# Altium PCB PCB1.PcbDoc (part 1 of 3)
Units mm, origin at the board's own origin, x right, y up, seen from the top; angles counter-clockwise.
Board outline 44.87 x 32.17 mm, 6 copper layers (Top Side, Inner Layer 1(GND), Inner Layer 2, Inner Layer 3, Inner Layer 4(GND), Bottom Side), stack 1.618 mm thick; 40 components, 39 nets, 233 pads, 118 vias.
Unrouted connection lines stored in the file: 1.
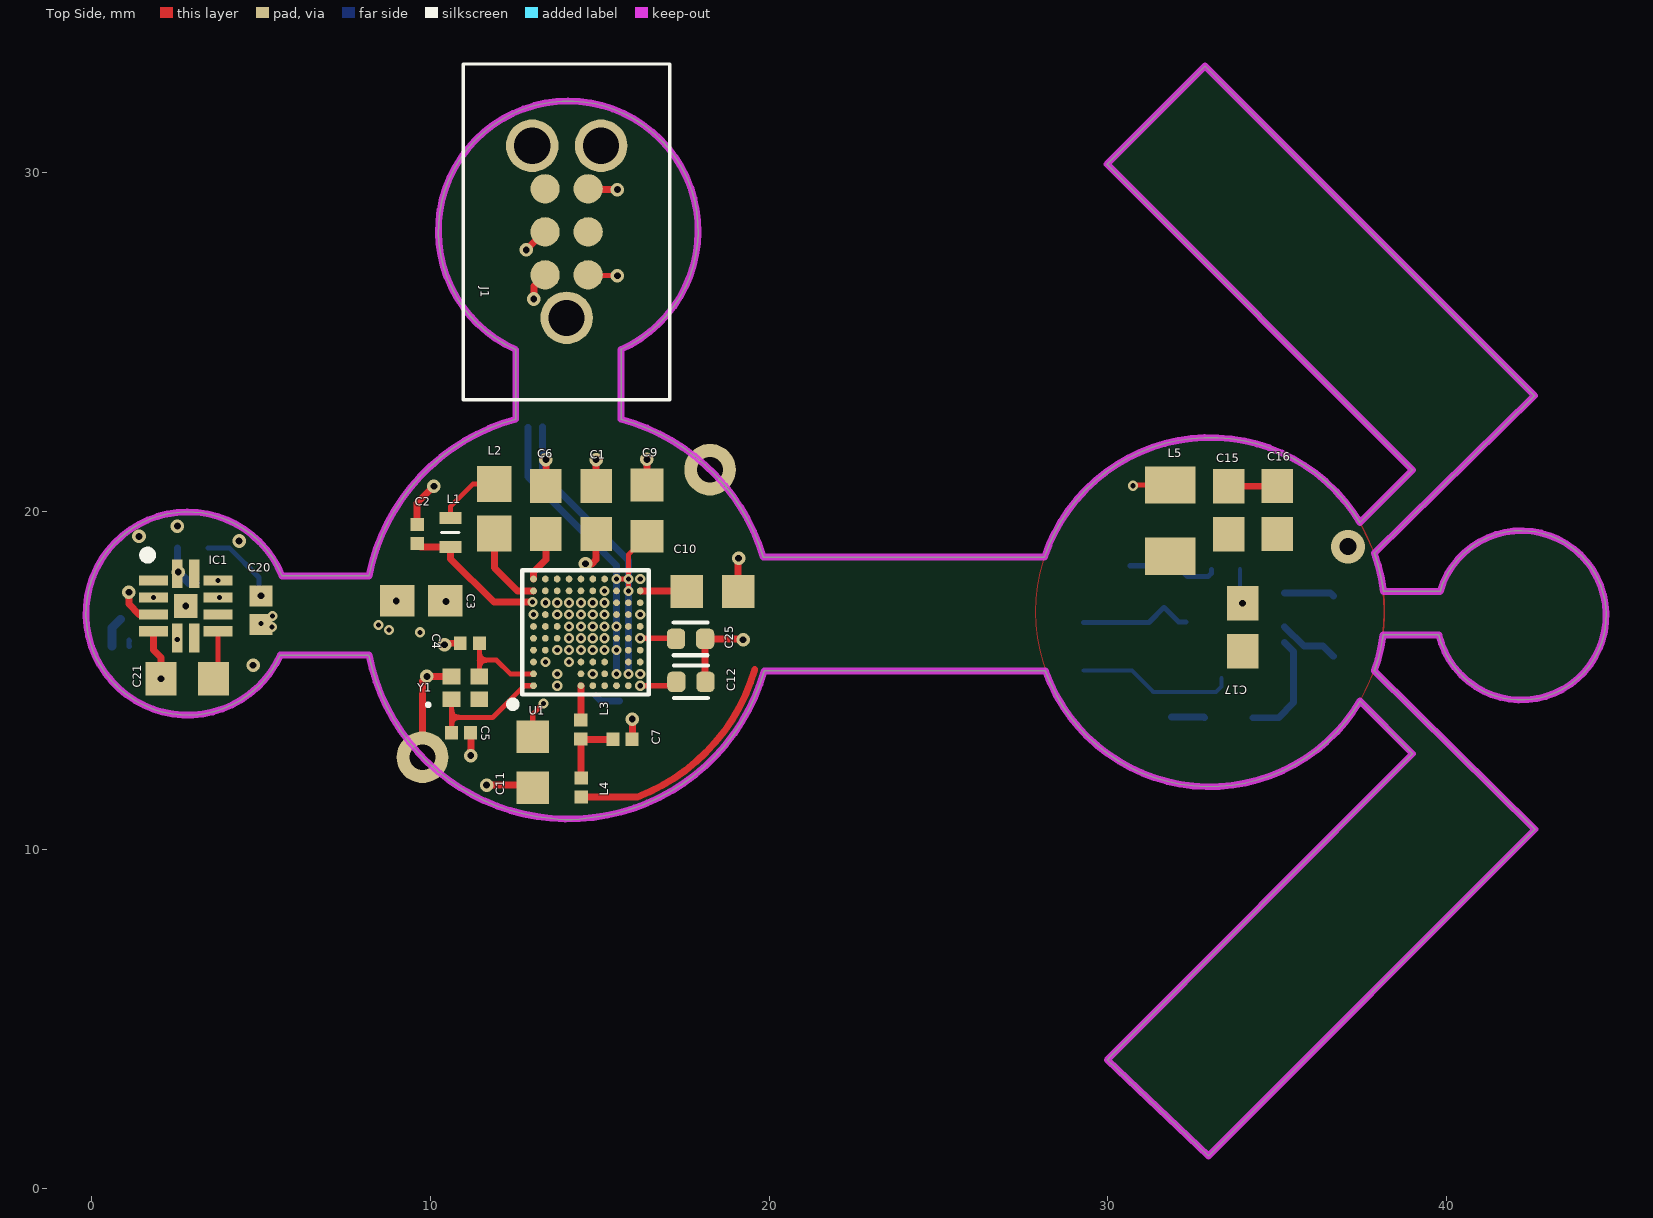
[diagram p0: Top Side view]
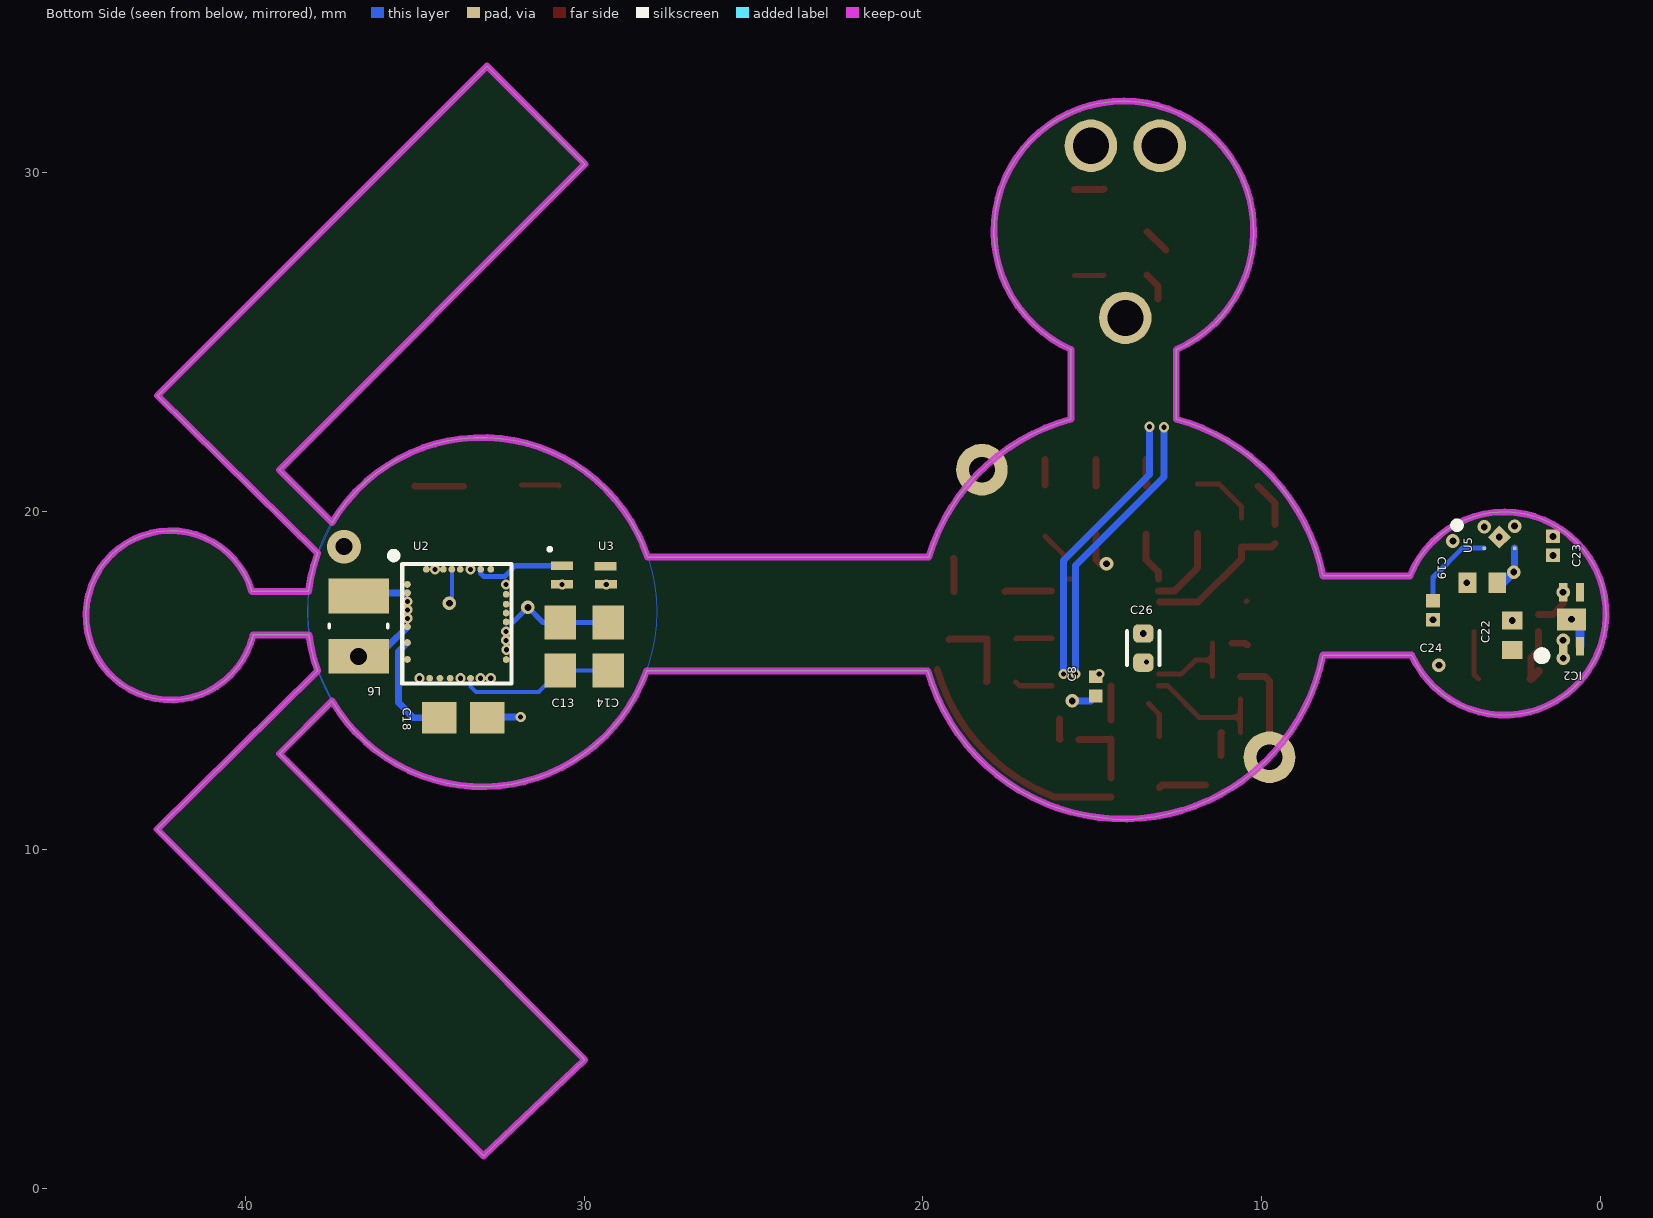
[diagram p1: Bottom Side view, seen from below]
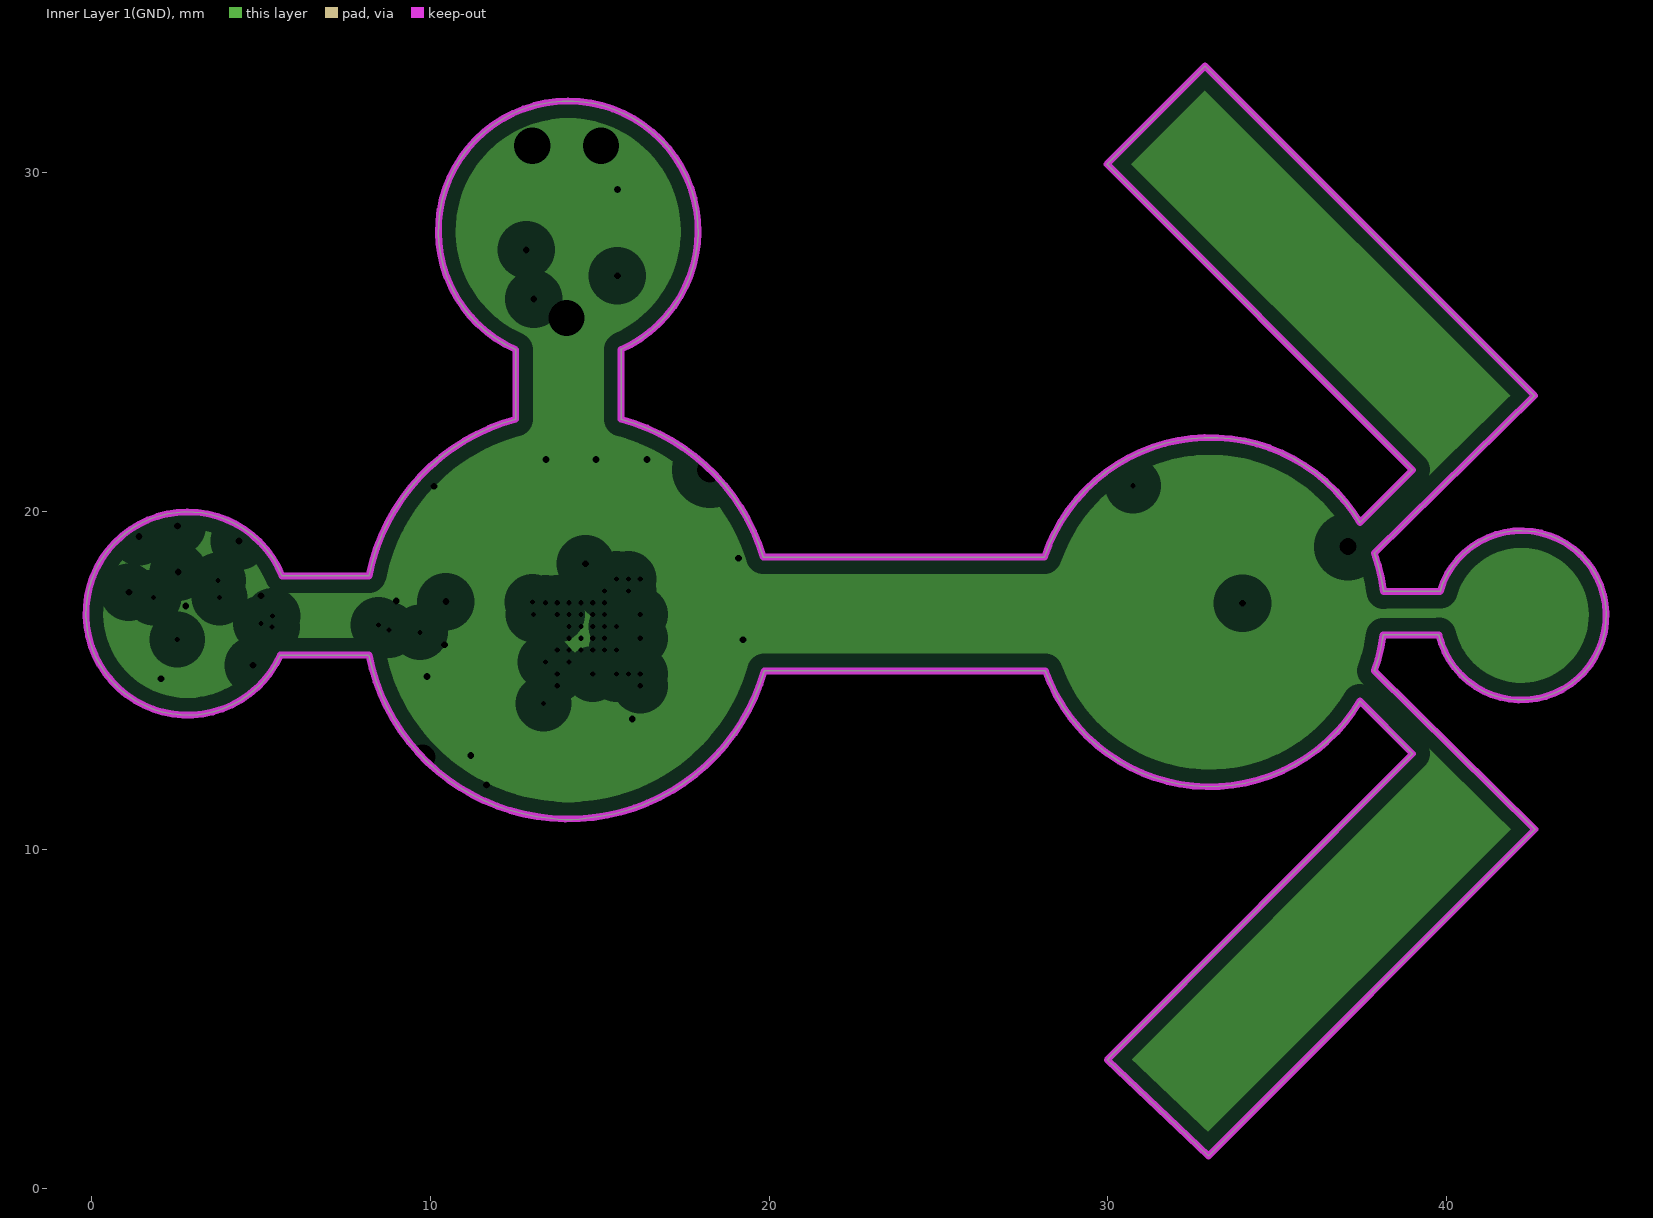
[diagram p2: Inner Layer 1(GND), clearances drawn from the general rule]
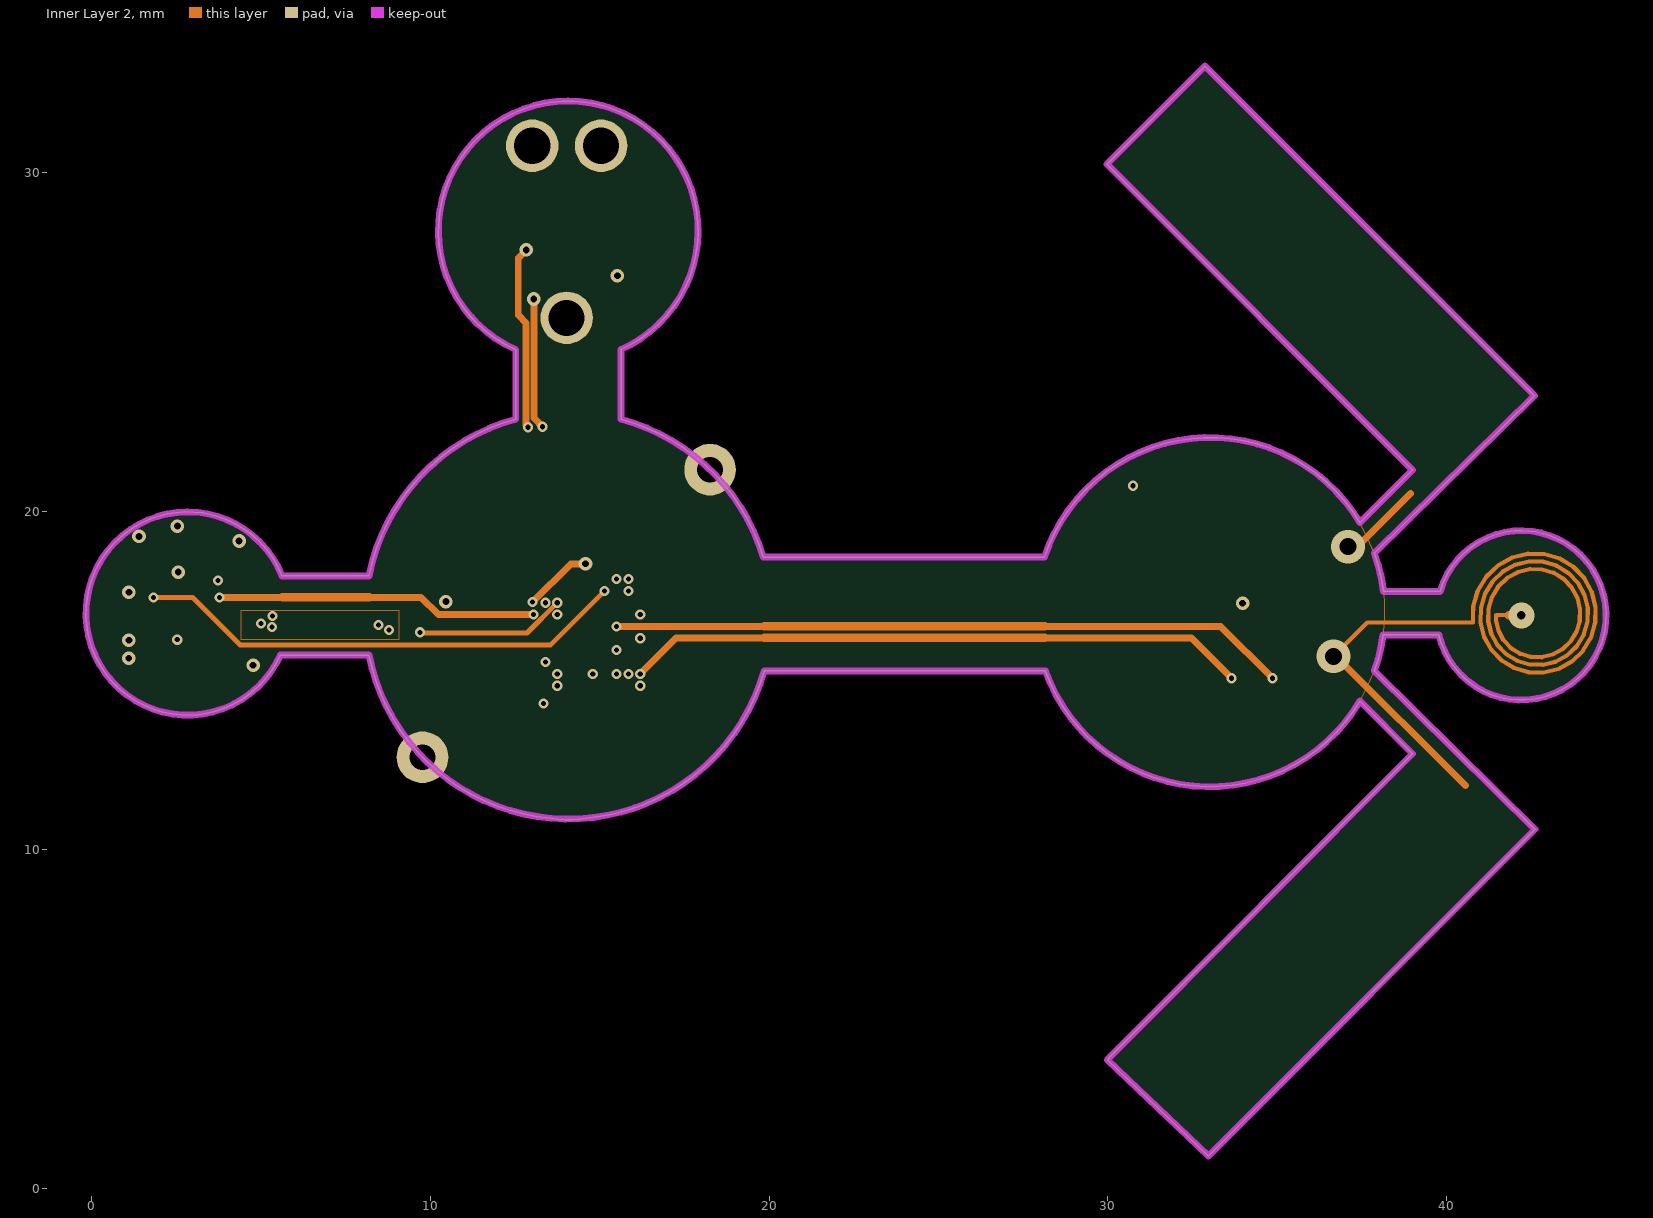
[diagram p3: Inner Layer 2]
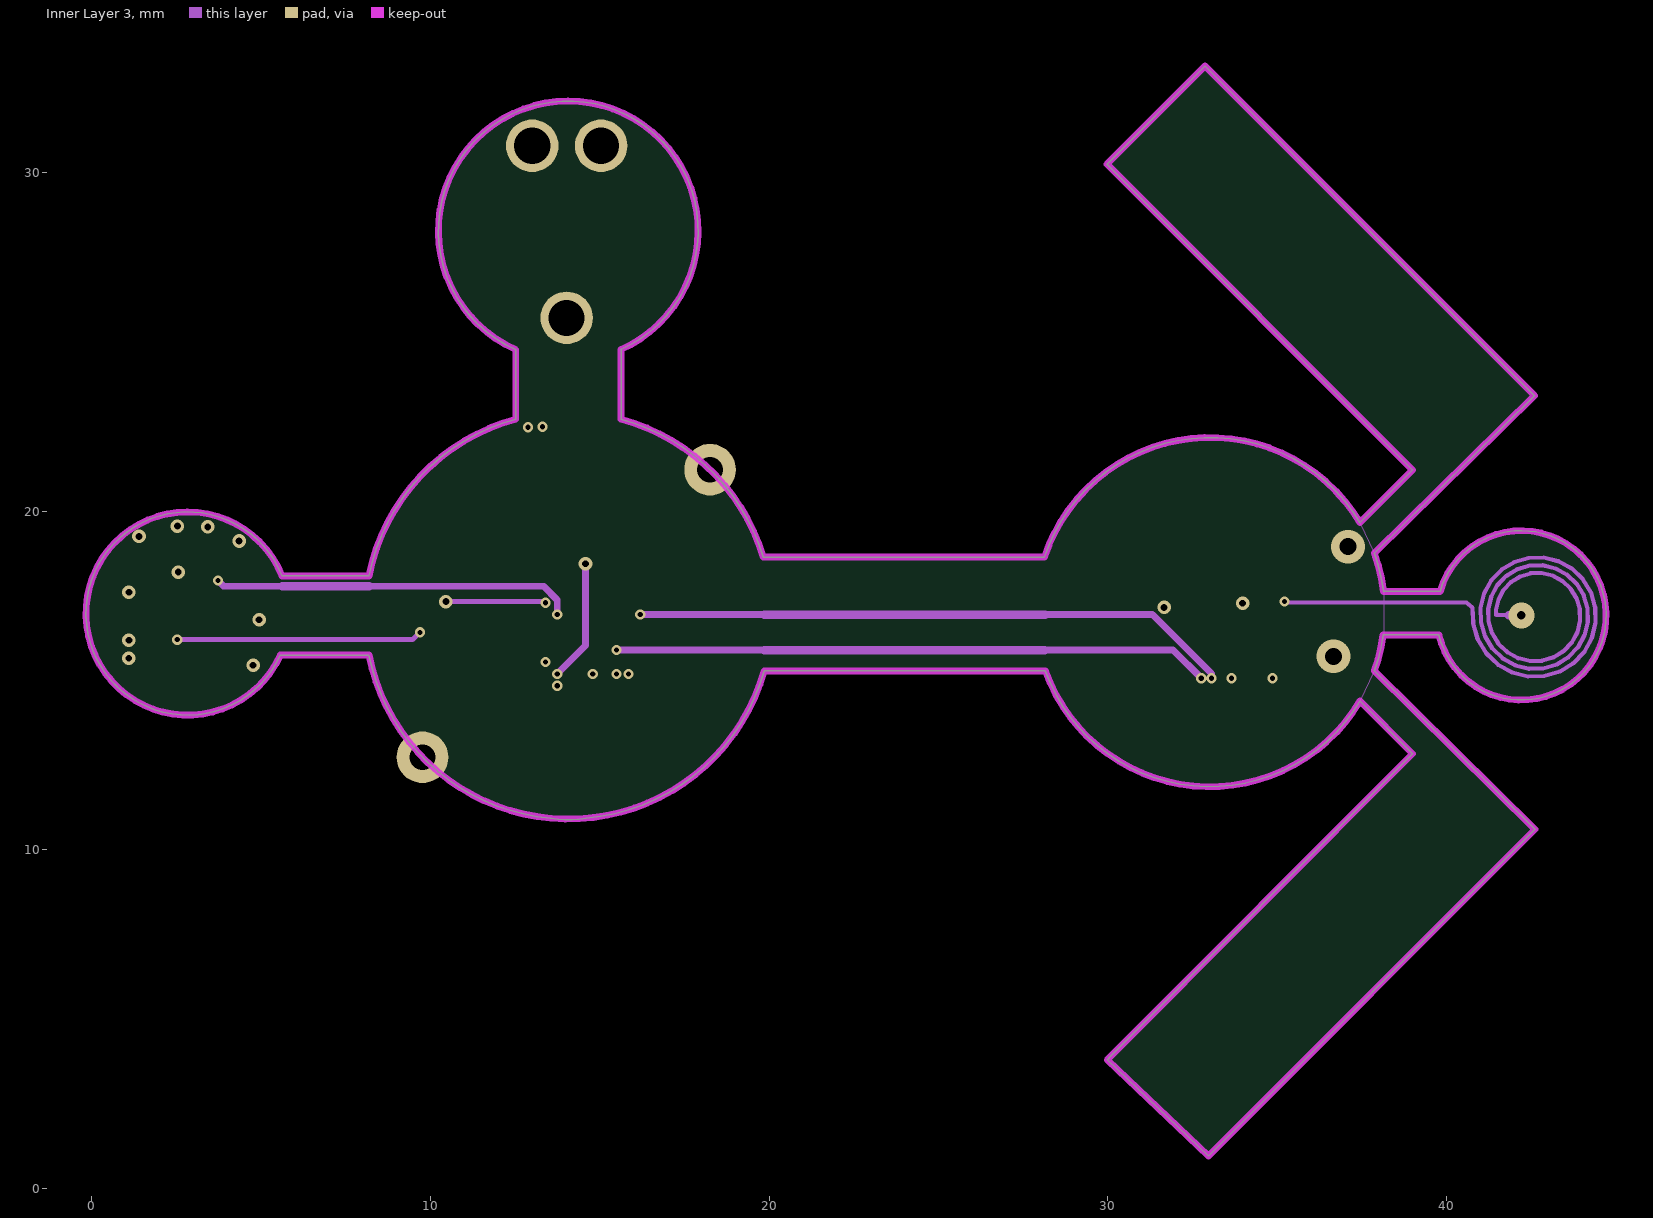
[diagram p4: Inner Layer 3]
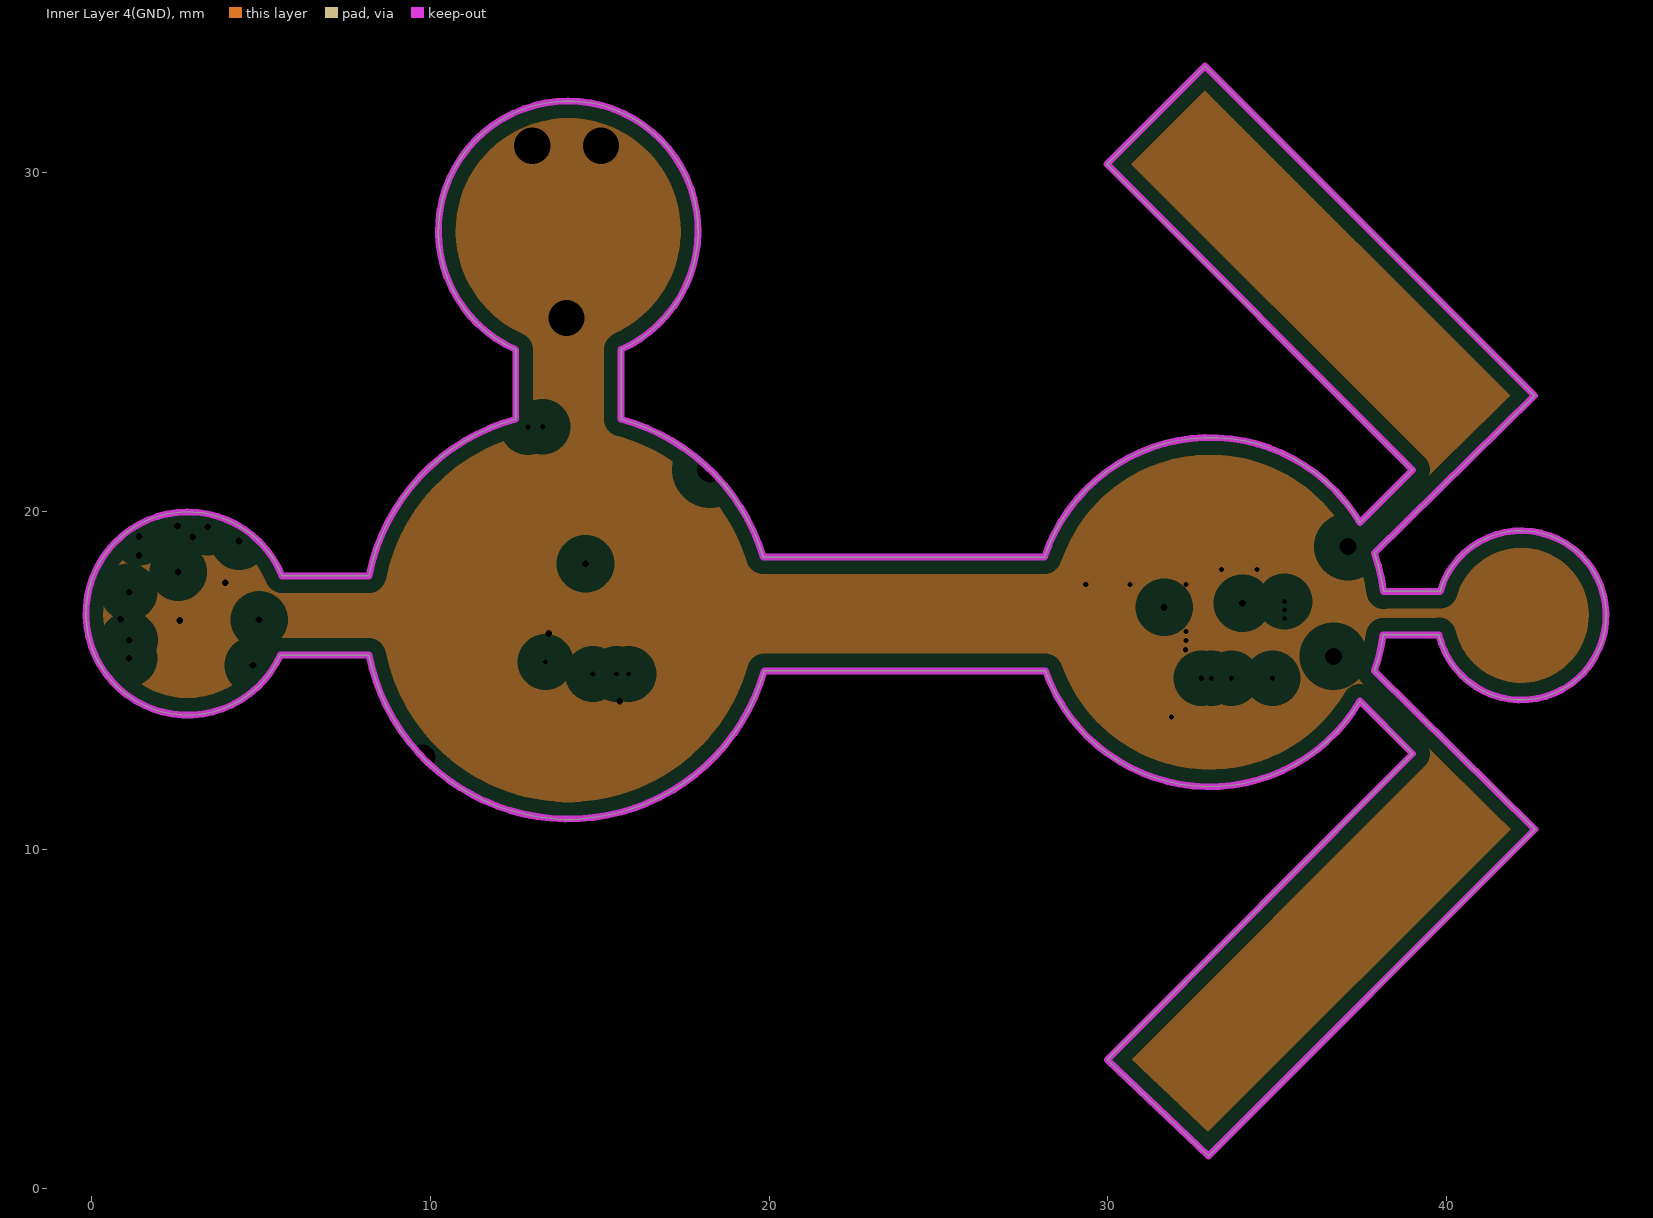
[diagram p5: Inner Layer 4(GND), clearances drawn from the general rule]
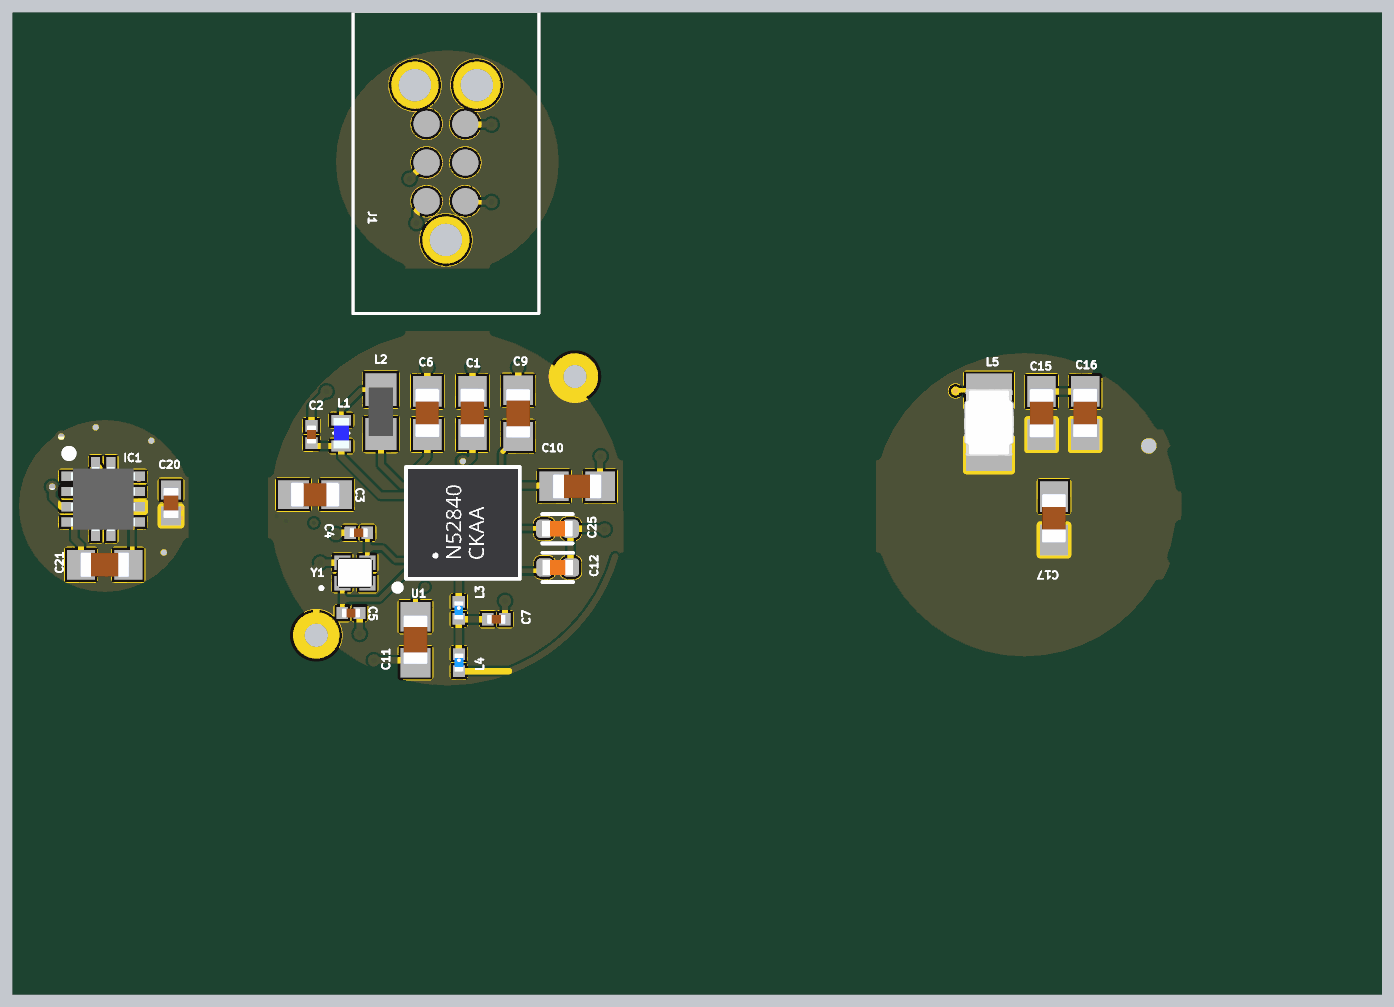
[diagram p7: 3D render of the assembled board from above, using the file's embedded part models]
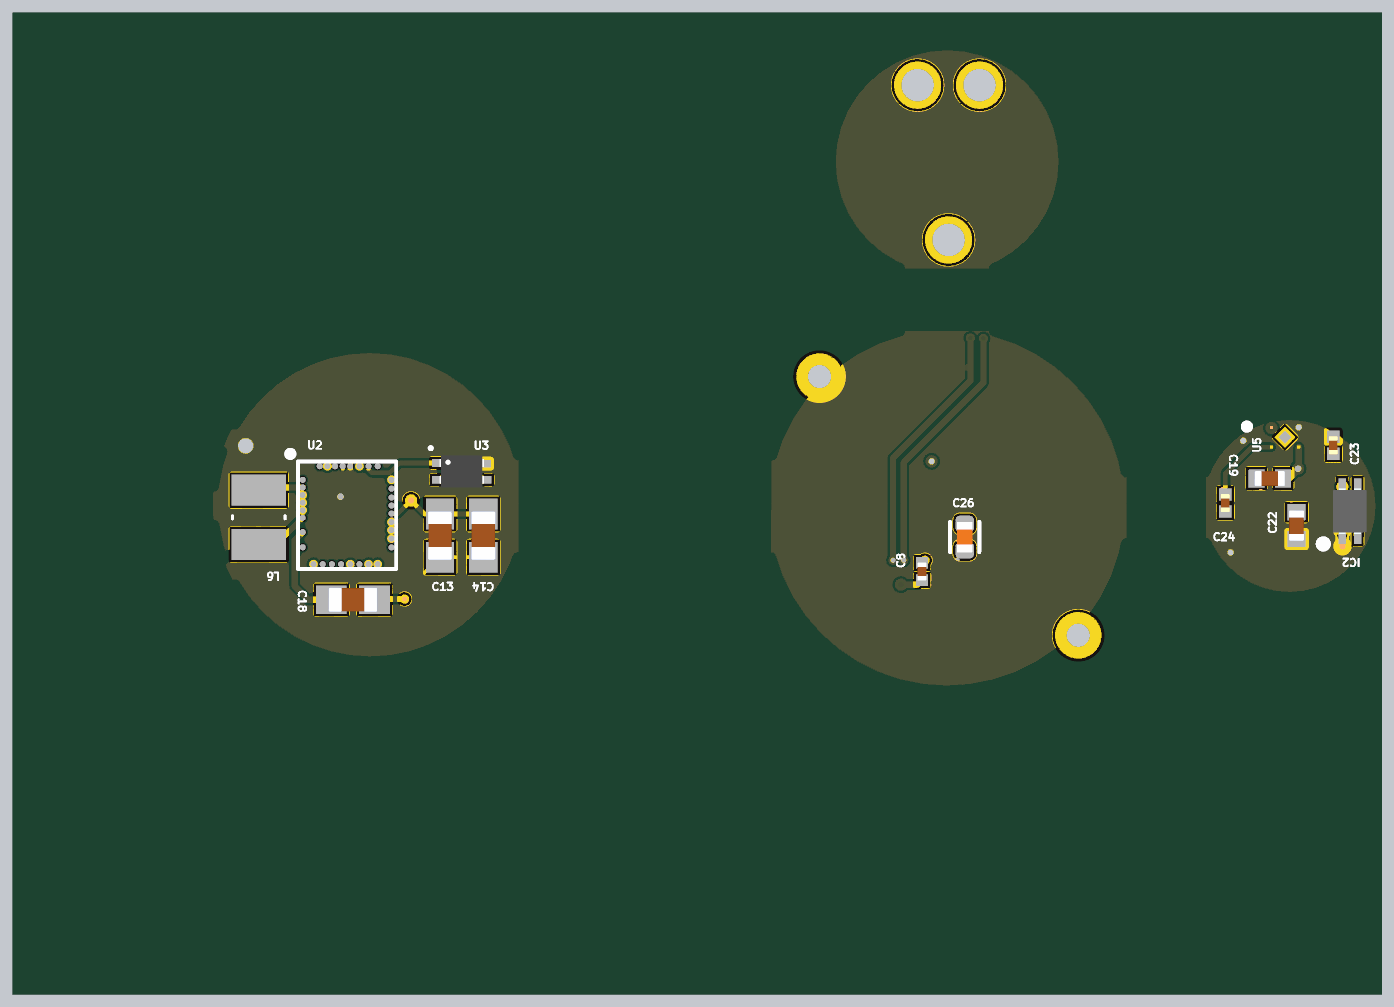
[diagram p8: 3D render of the assembled board from below, using the file's embedded part models]

## Layer stack, top to bottom
Flex Top Coverlay: solder mask 0.015, WE-SM-0001, Dk 3.5
Flex Top Coverlay: solder mask 0.03, WE-CL-0001, Dk 3.6
Top Side: signal copper 0.04
Polyamide: core 0.05, WE-PI-0103, Dk 3.4
Dielectric 1: prepreg 0.065, WE-PP-0034, Dk 3.5
Core 1: core 0.36, WE-CO-0047, Dk 4.7
Dielectric 2: prepreg 0.18, WE-PP-0036, Dk 3.9
Inner Layer 1(GND): plane copper 0.017, net GND
Polyimide 1: core 0.05, WE-PI-0103, Dk 3.4
Inner Layer 2: signal copper 0.017
Dielectric 3: prepreg 0.06, WE-PB-0001, Dk 3.2
Inner Layer 3: signal copper 0.017
Polyimide 2: core 0.05, WE-PI-0103, Dk 3.4
Inner Layer 4(GND): plane copper 0.017, net GND
Dielectric 4: prepreg 0.18, WE-PP-0036, Dk 3.9
Core 2: core 0.36, WE-CO-0047, Dk 4.7
Dielectric 5: prepreg 0.065, WE-PP-0034, Dk 3.5
Polyimide 4: core 0.05, WE-PI-0103, Dk 3.4
Bottom Side: signal copper 0.04
Bottom Solder: solder mask 0.03, WE-CL-0001, Dk 3.6
Bottom Solder: solder mask 0.015, WE-SM-0001, Dk 3.5

## Board outline
14.595,10.936 cw(c14.588,10.939) 14.591,10.933 cw(c14.599,10.926) 14.598,10.936 cw(c14.082,13.661) 13.548,10.94 cw(c13.535,10.902) 13.561,10.933 cw(c13.566,10.961) 13.551,10.936 cw(c13.549,10.937) 13.55,10.935 cw(c13.549,10.932) 13.551,10.933 cw(c14.075,16.914) 8.185,15.748 5.569,15.749 cw(c2.832,16.977) 5.619,18.085 8.186,18.085 cw(c14.074,16.914) 12.521,22.713 12.521,24.766 cw(c14.067,28.273) 15.625,24.771 15.628,24.771 15.628,22.713 cw(c14.075,16.914) 19.823,18.644 28.127,18.644 cw(c33.015,17.021) 37.438,19.66 38.994,21.216 29.969,30.241 32.864,33.136 42.593,23.407 37.866,18.762 cw(c33.081,17.026) 38.136,17.625 38.138,17.627 39.802,17.627 39.805,17.626 cw(c42.203,16.922) 39.772,16.344 39.77,16.343 38.12,16.343 cw(c33.072,16.991) 37.866,15.283 42.607,10.607 32.965,0.965 29.985,3.8 30.035,3.861 38.994,12.836 37.438,14.392 cw(c33.005,17.014) 28.155,15.283 19.852,15.283 cw(c14.075,16.913) 14.598,10.933 cw(c14.6,10.939)
board region "Layer Stack Region 1": 37.873,15.276 42.607,10.607 32.965,0.965 29.985,3.8 30.035,3.861 38.994,12.836 37.438,14.392
board region "Layer Stack Region 1": 37.438,19.66 38.994,21.216 29.969,30.241 32.864,33.136 42.593,23.407 37.866,18.762
board region "Layer Stack Region 1": 38.155,17.627 39.805,17.626 39.868,17.843 40.071,18.246 40.343,18.607 40.675,18.913 41.056,19.155 41.475,19.324 41.917,19.416 42.368,19.427 42.814,19.357 43.24,19.208 43.633,18.985 43.98,18.696 44.269,18.349 44.491,17.956 44.639,17.529 44.708,17.083 44.697,16.632 44.604,16.19 44.434,15.772 44.192,15.391 43.885,15.059 43.524,14.788 43.121,14.586 42.687,14.459 42.238,14.413 41.788,14.447 41.351,14.562 40.942,14.752 40.574,15.014 40.258,15.336 40.005,15.711 39.824,16.124 39.77,16.343 38.129,16.343
board region "Layer Stack Region 1": 19.823,18.644 28.127,18.644 28.154,15.283 19.852,15.283
board region "Layer Stack Region 1": 37.438,14.392 37.29,14.141 36.938,13.675 36.535,13.252 36.088,12.878 35.601,12.556 35.08,12.291 34.533,12.087 33.967,11.946 33.388,11.87 32.804,11.859 32.223,11.915 31.652,12.036 31.098,12.221 30.569,12.467 30.071,12.772 29.61,13.13 29.193,13.539 28.825,13.992 28.51,14.484 28.253,15.008 28.155,15.283 28.154,15.283 28.127,18.644 28.219,18.924 28.467,19.457 28.775,19.959 29.137,20.423 29.55,20.843 30.008,21.213 30.505,21.528 31.034,21.785 31.59,21.979 32.164,22.109 32.749,22.173 33.338,22.17 33.922,22.1 34.495,21.963 35.048,21.763 35.575,21.5 36.068,21.179 36.522,20.805 36.93,20.38 37.287,19.913 37.438,19.66 37.866,18.762 37.916,18.624 38,18.343 38.067,18.058 38.118,17.77 38.138,17.627 38.155,17.627 38.129,16.343 38.12,16.343 38.103,16.208 38.053,15.939 37.99,15.673 37.912,15.411 37.866,15.283 37.873,15.276
board region "Layer Stack Region 1": 15.628,24.771 15.628,22.713 12.521,22.713 12.521,24.766
board region "Layer Stack Region 1": 12.521,24.766 12.255,24.883 11.764,25.195 11.327,25.577 10.951,26.021 10.648,26.517 10.422,27.053 10.28,27.616 10.224,28.195 10.256,28.775 10.376,29.344 10.579,29.889 10.863,30.396 11.22,30.855 11.642,31.255 12.119,31.586 12.641,31.842 13.196,32.017 13.77,32.105 14.351,32.106 14.926,32.019 15.481,31.847 16.004,31.593 16.483,31.263 16.906,30.864 17.264,30.407 17.55,29.9 17.755,29.357 17.876,28.788 17.911,28.208 17.857,27.629 17.716,27.065 17.493,26.528 17.19,26.032 16.817,25.586 16.38,25.203 15.891,24.889 15.628,24.771
board region "Layer Stack Region 1": 19.852,15.283 19.77,14.992 19.548,14.429 19.271,13.891 18.94,13.384 18.561,12.913 18.136,12.482 17.67,12.096 17.167,11.759 16.633,11.474 16.074,11.245 15.494,11.073 14.899,10.959 14.598,10.936 14.468,10.912 14.205,10.887 13.94,10.888 13.677,10.914 13.551,10.933 13.23,10.961 12.597,11.086 11.981,11.278 11.389,11.535 10.829,11.853 10.305,12.23 9.825,12.661 9.394,13.141 9.016,13.664 8.697,14.225 8.44,14.816 8.248,15.432 8.185,15.748 8.186,18.085 8.241,18.359 8.4,18.892 8.607,19.409 8.862,19.905 9.161,20.375 9.502,20.815 9.883,21.221 10.3,21.591 10.749,21.92 11.227,22.206 11.729,22.447 12.252,22.641 12.521,22.713 15.628,22.713 15.997,22.614 16.704,22.324 17.369,21.947 17.98,21.489 18.529,20.958 19.005,20.36 19.402,19.708 19.713,19.01 19.823,18.644
board region "Layer Stack Region 1": 8.185,15.748 5.583,15.749 5.621,18.085 8.186,18.085
board region "Layer Stack Region 1": 5.583,15.749 5.569,15.749 5.463,15.514 5.175,15.087 4.819,14.715 4.404,14.409 3.943,14.179 3.449,14.03 2.938,13.968 2.423,13.994 1.921,14.107 1.445,14.305 1.009,14.58 0.627,14.926 0.31,15.332 0.066,15.786 -0.097,16.275 -0.173,16.785 -0.162,17.3 -0.063,17.806 0.12,18.287 0.383,18.73 0.718,19.122 1.115,19.451 1.562,19.707 2.046,19.884 2.553,19.975 3.068,19.979 3.577,19.895 4.063,19.725 4.514,19.475 4.915,19.151 5.255,18.764 5.524,18.325 5.62,18.085 5.621,18.085

## Design rules (kind name [scope] priority, off if disabled: settings)
Clearance [All] p1: gap=0.076 ignorepadtopadclearanceinfootprint=TRUE
ComponentClearance [All] p1: gap=0 collisioncheckmode=3 verticalgap=0 showdistances=FALSE donotcheckwithout3dbody=TRUE checkcomponentboundary=TRUE
DiffPairsRouting [All] p1: maxlimit=0.254 minlimit=0.254 mostfreqgap=0.254 substack1={52EEE6FB-54B4-4EB6-A2AD-3B474344E788} toplayer_{52eee6fb-54b4-4eb6-a2ad-3b474344e788}_minwidth=0.381 toplayer_{52eee6fb-54b4-4eb6-a2ad-3b474344e788}_maxwidth=0.381 toplayer_{52eee6fb-54b4-4eb6-a2ad-3b474344e788}_prefwidth=0.381 midlayer1_{52eee6fb-54b4-4eb6-a2ad-3b474344e788}_minwidth=0.381 midlayer1_{52eee6fb-54b4-4eb6-a2ad-3b474344e788}_maxwidth=0.381 midlayer1_{52eee6fb-54b4-4eb6-a2ad-3b474344e788}_prefwidth=0.381 midlayer3_{52eee6fb-54b4-4eb6-a2ad-3b474344e788}_minwidth=0.381 midlayer3_{52eee6fb-54b4-4eb6-a2ad-3b474344e788}_maxwidth=0.381 midlayer3_{52eee6fb-54b4-4eb6-a2ad-3b474344e788}_prefwidth=0.381 bottomlayer_{52eee6fb-54b4-4eb6-a2ad-3b474344e788}_minwidth=0.381 bottomlayer_{52eee6fb-54b4-4eb6-a2ad-3b474344e788}_maxwidth=0.381 bottomlayer_{52eee6fb-54b4-4eb6-a2ad-3b474344e788}_prefwidth=0.381 toplayer_minwidth=0.381 toplayer_maxwidth=0.381 toplayer_prefwidth=0.381 midlayer1_minwidth=0.381 midlayer1_maxwidth=0.381 midlayer1_prefwidth=0.381 midlayer3_minwidth=0.381 midlayer3_maxwidth=0.381 midlayer3_prefwidth=0.381 bottomlayer_minwidth=0.381 bottomlayer_maxwidth=0.381 bottomlayer_prefwidth=0.381 substack2={FC846959-10B6-4683-9593-CBB50DF69E61} toplayer_{fc846959-10b6-4683-9593-cbb50df69e61}_minwidth=0.381 toplayer_{fc846959-10b6-4683-9593-cbb50df69e61}_maxwidth=0.381 toplayer_{fc846959-10b6-4683-9593-cbb50df69e61}_prefwidth=0.381 midlayer1_{fc846959-10b6-4683-9593-cbb50df69e61}_minwidth=0.381 midlayer1_{fc846959-10b6-4683-9593-cbb50df69e61}_maxwidth=0.381 midlayer1_{fc846959-10b6-4683-9593-cbb50df69e61}_prefwidth=0.381 midlayer3_{fc846959-10b6-4683-9593-cbb50df69e61}_minwidth=0.381 midlayer3_{fc846959-10b6-4683-9593-cbb50df69e61}_maxwidth=0.381 midlayer3_{fc846959-10b6-4683-9593-cbb50df69e61}_prefwidth=0.381 bottomlayer_{fc846959-10b6-4683-9593-cbb50df69e61}_minwidth=0.381 bottomlayer_{fc846959-10b6-4683-9593-cbb50df69e61}_maxwidth=0.381 bottomlayer_{fc846959-10b6-4683-9593-cbb50df69e61}_prefwidth=0.381 maxuncoupledlength=12.7
PlaneClearance "PlaneClearance RF" [InNetClass('2.4GhZ RF')] p1: clearance=0.127
PlaneClearance [All] p2: clearance=0.75
PlaneConnect [All] p1: planeconnectstyle=Direct reliefexpansion=0.508 reliefentries=4 reliefconductorwidth=0.254 reliefairgap=0.254
PolygonConnect [All] p1: connectstyle=Direct reliefconductorwidth=0.254 reliefentries=4 polygonreliefangle="90 Angle" airgapwidth=0.254
RoutingVias [All] p1: holewidth=0.2 width=0.4 viastyle="Through Hole" minholewidth=0.1 minwidth=0.2 maxholewidth=0.5 maxwidth=1
SilkToSilkClearance [All] p1: silktosilkclearance=0.15
SolderMaskExpansion [All] p1: expansion=0.102 istentingtop=FALSE
Width [All] p1: maxlimit=0.203 minlimit=0.076 preferedwidth=0.152 substack1={52EEE6FB-54B4-4EB6-A2AD-3B474344E788} toplayer_{52eee6fb-54b4-4eb6-a2ad-3b474344e788}_minwidth=0.1 toplayer_{52eee6fb-54b4-4eb6-a2ad-3b474344e788}_maxwidth=0.5 toplayer_{52eee6fb-54b4-4eb6-a2ad-3b474344e788}_prefwidth=0.15 midlayer1_{52eee6fb-54b4-4eb6-a2ad-3b474344e788}_minwidth=0.1 midlayer1_{52eee6fb-54b4-4eb6-a2ad-3b474344e788}_maxwidth=0.5 midlayer1_{52eee6fb-54b4-4eb6-a2ad-3b474344e788}_prefwidth=0.15 midlayer3_{52eee6fb-54b4-4eb6-a2ad-3b474344e788}_minwidth=0.1 midlayer3_{52eee6fb-54b4-4eb6-a2ad-3b474344e788}_maxwidth=0.5 midlayer3_{52eee6fb-54b4-4eb6-a2ad-3b474344e788}_prefwidth=0.15 bottomlayer_{52eee6fb-54b4-4eb6-a2ad-3b474344e788}_minwidth=0.1 bottomlayer_{52eee6fb-54b4-4eb6-a2ad-3b474344e788}_maxwidth=0.5 bottomlayer_{52eee6fb-54b4-4eb6-a2ad-3b474344e788}_prefwidth=0.15 substack2={FC846959-10B6-4683-9593-CBB50DF69E61} toplayer_{fc846959-10b6-4683-9593-cbb50df69e61}_minwidth=0.1 toplayer_{fc846959-10b6-4683-9593-cbb50df69e61}_maxwidth=0.5 toplayer_{fc846959-10b6-4683-9593-cbb50df69e61}_prefwidth=0.15 midlayer1_{fc846959-10b6-4683-9593-cbb50df69e61}_minwidth=0.1 midlayer1_{fc846959-10b6-4683-9593-cbb50df69e61}_maxwidth=0.5 midlayer1_{fc846959-10b6-4683-9593-cbb50df69e61}_prefwidth=0.15 midlayer3_{fc846959-10b6-4683-9593-cbb50df69e61}_minwidth=0.1 midlayer3_{fc846959-10b6-4683-9593-cbb50df69e61}_maxwidth=0.5 midlayer3_{fc846959-10b6-4683-9593-cbb50df69e61}_prefwidth=0.15 bottomlayer_{fc846959-10b6-4683-9593-cbb50df69e61}_minwidth=0.1 bottomlayer_{fc846959-10b6-4683-9593-cbb50df69e61}_maxwidth=0.5 bottomlayer_{fc846959-10b6-4683-9593-cbb50df69e61}_prefwidth=0.15
25 further rules are at their usual default settings.

## Classes and differential pairs
component class SS8400C: b C13 C14 C15 C16 C17 C18 L5 L6 U2 U3
component class BMS: C19 C20 C21 C22 C23 C24 IC1 IC2 U5
net class "2.4GhZ RF": Antenna NetC7_2 NetL3_1 NetL4_2
component class "nRF 52840": C1 C2 C3 C4 C5 C6 C7 C8 C9 C10 C11 C12 C25 C26 J1 L1 L2 L3 L4 U1 Y1

## Components (designator, comment, footprint, x,y, rotation, side; value= is the part's Value field where it differs from the comment)
C1 "1uF" CAPC1608X90N#1 14.891,20.03 r270 top
C2 "47nF" CAPC0603X33N#1 9.607,19.321 r270 top
C3 "1uF" CAPC1608X90N#1 9.728,17.348 r180 top
C4 "10pF" CAPC0603X33N#1 11.162,16.099 r180 top
C5 "10pF" CAPC0603X33N#1 10.904,13.462 r180 top
C6 "100nF" CAPC1608X90N#1 13.41,20.03 r90 top
C7 "1pF" CAPC0603X33N#1 15.672,13.259 r180 top
C8 "820pF" CAPC0603X33N#1 14.891,14.827 r90 bottom
C9 "4.7uF" CAPC1608X95N 16.391,20.015 r270 top
C10 "4.7uF" CAPC1608X95N 18.325,17.621 r180 top
C11 "4.7uF" CAPC1608X95N 13.021,12.588 r90 top
C12 "100nF" CAPC1005X55N#1 17.69,14.961 r0 top
C13 "100nF" CAPC1608X90N#1 30.707,16.004 r270 bottom
C14 "10nF" CAPC1608X90N#1 29.284,16.004 r90 bottom
C15 "10nF" CAPC1608X90N#1 33.564,20.023 r270 top
C16 "100nF" CAPC1608X90N#1 34.996,20.029 r90 top
C17 "100nF" CAPC1608X90N#1 33.973,16.572 r270 top
C18 "2.2nF" CAPC1608X90N#1 33.564,13.899 r180 bottom
C19 "2.2uF" CAPC1005X55N#2 3.48,17.882 r0 bottom
C20 "1uF" CAPC1005X56N 5,17.075 r270 top
C21 "68nF" CAPC1608X90N#2 2.825,15.048 r0 top
C22 "100nF" CAPC1005X55N#2 2.601,16.331 r90 bottom
C23 "470nF" CAPC0603X33N#2 1.397,18.971 r90 bottom
C24 "470nF" CAPC0603X33N#2 4.941,17.075 r270 bottom
C25 "100nF" CAPC1005X55N#1 17.679,16.229 r0 top
C26 "100nF" CAPC1005X55N#1 13.491,15.957 r270 bottom
IC1 "LTC4126EV#TRMPBF" QFN50P200X200X83-13N-D 2.776,17.201 r0 top
IC2 "DRV5032FDDMRR" SON50P140X110X40-5N 0.85,16.806 r90 bottom
J1 "TC2030-IDC-NL" TC2030IDCNL 14.021,28.245 r90 top
L1 "15nH" LQG15WH0N7B02D 10.588,19.368 r90 top
L2 "10uH" INDC1608X100N 11.887,20.066 r270 top
L3 "3.9nH" INDC0603X33N 14.443,13.553 r270 top
L4 "4.7nH" INDC0603X33N 14.446,11.836 r270 top
L5 "4.7uH" B82498F 31.841,19.717 r270 top
L6 "47uH" AISC0805F470GT 36.655,16.604 r0 bottom
U1 "nRF52840_CKAA" BGA94C35P10X10_352X356X50 14.618,16.42 r90 top
U2 "SS8400C" SS8400C_WLCSP 33.757,16.673 r180 bottom
U3 "STLM20DD9F" QFN55P130X100X55-4N 29.995,18.112 r180 bottom
U5 "AP7340-33FS4-7" VREG_AP7340-33FS4-7 2.98,19.232 r180 bottom
Y1 "32Mhz" XTAL_ECS-374-8-48-CKY-TR 11.033,14.78 r0 top

## Footprints (in the part's own frame and the unit in brackets; to place one, negate y for a bottom-side part, rotate by r counter-clockwise, add the part's x,y. Pads: shape width x height; smd on the part's side, far side on the other; paste and mask are expansions set on the pad)
AISC0805F470GT [mm]
  rect 1.78x1.02 smd: 1(0,-0.89) 2(0,0.89)
  silkscreen extent -0.86,-0.05 0.86,0.05
B82498F [mm]
  rect 1.1x1.5 smd: 1(-1.05,0) 2(1.05,0)
  body extent -1.1,-0.81 1.1,0.81, height 1.28
BGA94C35P10X10_352X356X50 [mm]
  round 0.2 smd mask+0.04: A1(-1.575,1.575) A2(-1.225,1.575) A3(-0.875,1.575) A4(-0.525,1.575) A5(-0.175,1.575) A6(0.175,1.575) A7(0.525,1.575) A8(0.875,1.575) A9(1.225,1.575) A10(1.575,1.575) B3(-0.875,1.225) B4(-0.525,1.225) B5(-0.175,1.225) B6(0.175,1.225) B7(0.525,1.225) B8(0.875,1.225) B9(1.225,1.225) B10(1.575,1.225) C1(-1.575,0.875) C2(-1.225,0.875) C4(-0.525,0.875) C5(-0.175,0.875) C6(0.175,0.875) C7(0.525,0.875) C8(0.875,0.875) C9(1.225,0.875) C10(1.575,0.875) D3(-0.875,0.525) D4(-0.525,0.525) D5(-0.175,0.525) D6(0.175,0.525) D7(0.525,0.525) D8(0.875,0.525) D9(1.225,0.525) D10(1.575,0.525) E1(-1.575,0.175) E2(-1.225,0.175) E3(-0.875,0.175) E4(-0.525,0.175) E5(-0.175,0.175) E6(0.175,0.175) E7(0.525,0.175) E8(0.875,0.175) E9(1.225,0.175) E10(1.575,0.175) F1(-1.575,-0.175) F2(-1.225,-0.175) F3(-0.875,-0.175) F4(-0.525,-0.175) F5(-0.175,-0.175) F6(0.175,-0.175) F7(0.525,-0.175) F8(0.875,-0.175) F9(1.225,-0.175) F10(1.575,-0.175) G1(-1.575,-0.525) G2(-1.225,-0.525) G3(-0.875,-0.525) G4(-0.525,-0.525) G5(-0.175,-0.525) G6(0.175,-0.525) G7(0.525,-0.525) G8(0.875,-0.525) G9(1.225,-0.525) G10(1.575,-0.525) H1(-1.575,-0.875) H2(-1.225,-0.875) H4(-0.525,-0.875) H5(-0.175,-0.875) H6(0.175,-0.875) H7(0.525,-0.875) H8(0.875,-0.875) H9(1.225,-0.875) H10(1.575,-0.875) J1(-1.575,-1.225) J2(-1.225,-1.225) J3(-0.875,-1.225) J4(-0.525,-1.225) J5(-0.175,-1.225) J6(0.175,-1.225) J7(0.525,-1.225) J8(0.875,-1.225) J9(1.225,-1.225) J10(1.575,-1.225) K1(-1.575,-1.575) K2(-1.225,-1.575) K3(-0.875,-1.575) K4(-0.525,-1.575) K5(-0.175,-1.575) K6(0.175,-1.575) K7(0.525,-1.575) K8(0.875,-1.575) K9(1.225,-1.575) K10(1.575,-1.575)
  silkscreen extent -2.22,-1.83 1.83,2.28, body extent -1.77,-1.76 1.77,1.84, height 0.47
CAPC0603X33N#1 [mm]
  rect 0.38x0.4 smd: 1(-0.281,0) 2(0.281,0)
  body extent -0.3,-0.15 0.3,0.15, height 0.3
CAPC0603X33N#2 [mm]
  rect 0.4x0.42 smd: 1(-0.28,0) 2(0.28,0)
  body extent -0.3,-0.15 0.3,0.15, height 0.33
CAPC1005X55N#1 [mm]
  rrect53% 0.54x0.6 smd: 1(-0.43,0) 2(0.43,0)
  silkscreen extent -0.5,-0.48 0.5,0.48, body extent -0.5,-0.25 0.5,0.25, height 0.55
CAPC1005X55N#2 [mm]
  rect 0.53x0.6 smd: 1(-0.437,0) 2(0.437,0)
  body extent -0.5,-0.25 0.5,0.25, height 0.55
CAPC1005X56N [mm]
  rect 0.62x0.67 smd: 1(-0.425,0) 2(0.425,0)
  body extent -0.5,-0.25 0.5,0.25, height 0.56
CAPC1608X90N#1 [mm]
  rect 1.01x0.93 smd: 1(-0.709,0) 2(0.709,0)
  body extent -0.8,-0.4 0.8,0.4, height 0.9
CAPC1608X90N#2 [mm]
  rect 0.92x0.98 smd: 1(-0.775,0) 2(0.775,0)
  body extent -0.8,-0.41 0.8,0.41, height 0.9
CAPC1608X95N [mm]
  rect 0.96x0.97 smd: 1(-0.755,0) 2(0.755,0)
  body extent -0.8,-0.4 0.8,0.4, height 0.95
INDC0603X33N [mm]
  rect 0.38x0.4 smd: 1(-0.281,0) 2(0.281,0)
  body extent -0.3,-0.15 0.3,0.15, height 0.33
INDC1608X100N [mm]
  rect 1.06x1.02 smd: 1(-0.728,0) 2(0.728,0)
  body extent -0.8,-0.4 0.8,0.4, height 1
LQG15WH0N7B02D [mm]
  rect 0.35x0.65 smd: 1(-0.425,0) 2(0.425,0)
  silkscreen extent 0,-0.25 0,0.25, body extent -0.5,-0.25 0.5,0.25, height 0.55
QFN50P200X200X83-13N-D [mm]
  rect 0.85x0.3 smd: 1(-0.95,0.75) 2(-0.95,0.25) 3(-0.95,-0.25) 4(-0.95,-0.75) 7(0.95,-0.75) 8(0.95,-0.25) 9(0.95,0.25) 10(0.95,0.75)
  rect 0.3x0.85 smd: 5(-0.25,-0.95) 6(0.25,-0.95) 11(0.25,0.95) 12(-0.25,0.95)
  rect 0.7x0.7 smd: 13(0,0)
  silkscreen extent -1.25,1.38 -1,1.62, body extent -1.05,-1.05 1.05,1.05, height 0.83
QFN55P130X100X55-4N [mm] "QFN, 4-Leads, Body 1.30x1.00mm, Pitch 0.55mm, IPC Medium Density"
  rect 0.65x0.25 smd: 1(-0.65,0.275) 2(-0.65,-0.275) 3(0.65,-0.275) 4(0.635,0.254)
  silkscreen extent -1.07,0.71 -0.97,0.81, body extent -0.72,-0.53 0.72,0.53, height 0.55
SON50P140X110X40-5N [mm]
  rect 0.55x0.25 smd: 1(-0.8,0.25) 2(-0.8,-0.25) 3(0.8,-0.25) 4(0.8,0.25)
  rect 0.65x0.85 smd: 5(0,0)
  silkscreen extent -1.2,0.75 -0.95,1, body extent -0.75,-0.55 0.75,0.55, height 0.4
SS8400C_WLCSP [mm]
  round 0.2 smd mask+0.04: 1(1.458,1.162) 2(1.458,0.871) 3(1.458,0.58) 4(1.458,0.054) 5(1.458,-0.226) 6(1.458,-0.488) 7(1.458,-0.766) 8(1.458,-1.057) 9(1.003,-1.607) 10(0.703,-1.607) 11(0.406,-1.607) 12(0.106,-1.607) 13(-0.197,-1.607) 14(-0.497,-1.607) 15(-0.799,-1.607) 16(-1.101,-1.607) 17(-1.457,-1.053) 18(-1.457,-0.555) 19(-1.457,-0.088) 20(-1.457,0.162) 21(-1.457,0.412) 22(-1.457,0.662) 23(-1.457,0.912) 24(-1.457,1.162) 25(-0.897,1.608) 26(-0.646,1.608) 27(-0.397,1.608) 28(-0.144,1.608) 29(0.103,1.608) 30(0.406,1.608) 31(0.706,1.608) 32(1.006,1.608) 33(1.458,0.318)
  silkscreen extent -1.96,-1.76 1.61,2.11, body extent -1.55,-1.7 1.55,1.7, height 0.25
TC2030IDCNL [mm]
  round 0.863 smd: 1(-1.27,-0.635) 2(-1.27,0.635) 3(0,-0.635) 4(0,0.635) 5(1.27,-0.635) 6(1.27,0.635)
  round 1.55 hole 1.067: 7(-2.54,0) 8(2.54,-1.016) 9(2.54,1.016)
  silkscreen extent -4.95,-3.05 4.95,3.05
VREG_AP7340-33FS4-7 [mm]
  rect 0.1x0.1 smd paste-1 mask+0: 1(-0.45,0.325) 2(-0.45,-0.325) 3(0.45,-0.325) 4(0.45,0.325)
  rect 0.48x0.48 smd rot 45 paste-0.088: 5(0,0)
  silkscreen extent -1.35,0.25 -1.15,0.45
XTAL_ECS-374-8-48-CKY-TR [mm]
  rect 0.52x0.47 smd: 1(-0.41,-0.335) 2(0.41,-0.335) 3(0.41,0.335) 4(-0.41,0.335)
  silkscreen extent -1.15,-0.55 -1.05,-0.45, body extent -0.6,-0.5 0.6,0.5, height 0.33

## Part data
C1 C3: library part C1608X7R1C105K080AC, "TDK - C1608X7R1C105K080AC - SMD Multilayer Ceramic Capacitor, 1 µF, 16 V, 0603 [1608 Metric], ± 10%, X7R, C Series TDK", Case Code (Imperial)=0603, Case Code (Metric)=1608, Dielectric=X7R, Dielectric Material=Ceramic, Manufacturer=TDK, Max Operating Temperature=125°C, Min Operating Temperature=-55°C, Package Quantity=1, Tolerance=10%, Voltage=16V, Capacitance=1uF, Case/Package=0603, Category="Ceramic Capacitors", ComponentLink1Description=https://datasheet.ciiva.com/11788/0900766b80c1bb00-11788075.pdf?src-supplier=RSComponents, ComponentLink1URL=https://datasheet.ciiva.com/11788/0900766b80c1bb00-11788075.pdf?src-supplier=RSComponents, ComponentLink2Description=https://datasheet.ciiva.com/22648/1796654-22648704.pdf?src-supplier=Element14, ComponentLink2URL=https://datasheet.ciiva.com/22648/1796654-22648704.pdf?src-supplier=Element14, ComponentLink3Description=https://datasheet.ciiva.com/26285/3025c1608x7r1c105k080ac-26285242.pdf?src-supplier=Onlinecomponents.com, ComponentLink3URL=https://datasheet.ciiva.com/26285/3025c1608x7r1c105k080ac-26285242.pdf?src-supplier=Onlinecomponents.com, ComponentLink4Description=https://datasheet.ciiva.com/15192/getdatasheetpartid-715881-15192029.pdf?src-supplier=Verical, ComponentLink4URL=https://datasheet.ciiva.com/15192/getdatasheetpartid-715881-15192029.pdf?src-supplier=Verical, ComponentLink5Description=https://datasheet.ciiva.com/17487/e412-c-17487343.pdf?src-supplier=Avnet+Europe, ComponentLink5URL=https://datasheet.ciiva.com/17487/e412-c-17487343.pdf?src-supplier=Avnet+Europe, ComponentLink6Description=https://datasheet.ciiva.com/22694/1796654-22694127.pdf?src-supplier=Element14, ComponentLink6URL=https://datasheet.ciiva.com/22694/1796654-22694127.pdf?src-supplier=Element14, ComponentLink7Description=https://datasheet.ciiva.com/6250/tdkmlcccaprange-6250871.pdf?src-supplier=Digi-Key, ComponentLink7URL=https://datasheet.ciiva.com/6250/tdkmlcccaprange-6250871.pdf?src-supplier=Digi-Key, ComponentLink8Description=https://datasheet.ciiva.com/16199/e412-c-16199815.pdf?src-supplier=Future+Electronics, ComponentLink8URL=https://datasheet.ciiva.com/16199/e412-c-16199815.pdf?src-supplier=Future+Electronics, ComponentLink9Description=https://datasheet.ciiva.com/6156/1571323-6156168.pdf?src-supplier=Farnell, ComponentLink9URL=https://datasheet.ciiva.com/6156/1571323-6156168.pdf?src-supplier=Farnell, ComponentLink10Description=https://datasheet.ciiva.com/48671/e412-c-48671305.pdf?src-supplier=Avnet, ComponentLink10URL=https://datasheet.ciiva.com/48671/e412-c-48671305.pdf?src-supplier=Avnet, ComponentLink11Description=https://datasheet.ciiva.com/22749/1744655-22749595.pdf?src-supplier=Element14, ComponentLink11URL=https://datasheet.ciiva.com/22749/1744655-22749595.pdf?src-supplier=Element14, Construction=Flat, Depth=0.8mm, Height=0.8mm, Lead Free="Lead Free", Length=1.6mm, Manufacturer Part Number=C1608X7R1C105K080AC, Mount="Surface Mount", Packaging="Tape and Reel", Pricing 1="1=0.13000, 10=0.09600, 50=0.05440, 100=0.04500, 500=0.03156, 1000=0.02613 (USD)", Radiation Hardening=No, REACH SVHC="No SVHC", Resistor Type=Ceramic, RoHS=Yes, RoHS Compliant=Yes, Series=C, Stock 1=2663219, Supplier 1=Digi-Key, Termination=SMD/SMT, Thickness=0.037inch, Voltage Rating=16V, Voltage Rating (DC)=16V, Weight=7.1E-05oz, Width=0.031inch
C2: library part GRM033R61C473KE84D, "0201 47 nF 16 V ±10% Tolerance X5R SMT Multilayer Ceramic Capacitor", Case Code (Imperial)=0201, Case Code (Metric)=0603, Dielectric=X5R, Manufacturer=Murata, Max Operating Temperature=85°C, Min Operating Temperature=-55°C, Package Quantity=15000, Tolerance=10%, Voltage Rating=16V, Capacitance=47nF, Case/Package=0201, Category="Ceramic Capacitors", ComponentLink1Description=https://datasheet.ciiva.com/18699/grm033r61c473ke84-01-18699268.pdf?src-supplier=Digi-Key, ComponentLink1URL=https://datasheet.ciiva.com/18699/grm033r61c473ke84-01-18699268.pdf?src-supplier=Digi-Key, ComponentLink2Description=https://datasheet.ciiva.com/18699/partnumbering-e-01-18699269.pdf?src-supplier=Digi-Key, ComponentLink2URL=https://datasheet.ciiva.com/18699/partnumbering-e-01-18699269.pdf?src-supplier=Digi-Key, ComponentLink3Description=https://datasheet.ciiva.com/24221/c02e-24221301.pdf?src-supplier=Mouser, ComponentLink3URL=https://datasheet.ciiva.com/24221/c02e-24221301.pdf?src-supplier=Mouser, ComponentLink4Description=https://datasheet.ciiva.com/18699/partnumbering-e-01-18699270.pdf?src-supplier=Digi-Key, ComponentLink4URL=https://datasheet.ciiva.com/18699/partnumbering-e-01-18699270.pdf?src-supplier=Digi-Key, Height=0.3mm, Lead Free="Lead Free", Length=0.024inch, Manufacturer Part Number=GRM033R61C473KE84D, Mount="Surface Mount", Packaging="Tape and Reel", Pricing 1="1=0.10000, 10=0.06800, 50=0.03720, 100=0.03040, 500=0.02174, 1000=0.01708, 2500=0.01552, 5000=0.01428 (USD)", RoHS=Yes, RoHS Compliant=Yes, Stock 1=123710, Supplier 1=Digi-Key, Termination=SMD/SMT, Thickness=0.013inch, Voltage Rating (DC)=16V, Weight=1.2E-05oz, Width=0.012inch
C4 C5: library part GRM0335C2A100JA01D, "Cap Ceramic 10pF 100V C0G 5% Pad SMD 0201 125C T/R", Case Code (Imperial)=0201, Case Code (Metric)=0603, Dielectric=C0G, Manufacturer=Murata, Max Operating Temperature=125°C, Min Operating Temperature=-55°C, Package Quantity=1, Tolerance=5%, Voltage Rating=100V, Capacitance=10pF, Case/Package=0201, Category="Ceramic Capacitors", ComponentLink1Description=https://datasheet.ciiva.com/18699/partnumbering-e-01-18699375.pdf?src-supplier=Digi-Key, ComponentLink1URL=https://datasheet.ciiva.com/18699/partnumbering-e-01-18699375.pdf?src-supplier=Digi-Key, ComponentLink2Description=https://datasheet.ciiva.com/18699/partnumbering-e-01-18699374.pdf?src-supplier=Digi-Key, ComponentLink2URL=https://datasheet.ciiva.com/18699/partnumbering-e-01-18699374.pdf?src-supplier=Digi-Key, ComponentLink3Description=https://datasheet.ciiva.com/24221/c02e-24221150.pdf?src-supplier=Mouser, ComponentLink3URL=https://datasheet.ciiva.com/24221/c02e-24221150.pdf?src-supplier=Mouser, Height=0.3mm, Length=0.024inch, Manufacturer Part Number=GRM0335C2A100JA01D, Mount="Surface Mount", Packaging="Tape and Reel", Pricing 1="1=0.10000, 10=0.03200, 50=0.01720, 100=0.01410, 500=0.01006, 1000=0.00791, 2500=0.00719, 5000=0.00661 (USD)", RoHS=Yes, RoHS Compliant=Yes, Stock 1=52350, Supplier 1=Digi-Key, Termination=SMD/SMT, Thickness=0.013inch, Voltage Rating (DC)=100V, Weight=1.2E-05oz, Width=0.012inch
C6 C13 C16 C17: library part 06033G104ZAT2A, "0603 100 nF 25 V -20 / +80 % Tolerance Y5V SMT Multilayer Ceramic Capacitor", Case Code=0603, Case Code (Metric)=1608, Dielectric=Y5V, Insulation Resistance=100GR, Manufacturer="Kyocera AVX", Max Operating Temperature=85°C, Min Operating Temperature=-30°C, Package Quantity=1, Tolerance=80%, Voltage=25V, Capacitance=100nF, Case Code (Imperial)=0603, Case/Package=0603, Category="Ceramic Capacitors", ComponentLink1Description=https://datasheet.ciiva.com/1124/318409-1124608.pdf?src-supplier=Element14, ComponentLink1URL=https://datasheet.ciiva.com/1124/318409-1124608.pdf?src-supplier=Element14, ComponentLink2Description=https://datasheet.ciiva.com/11786/0900766b802d4699-11786267.pdf?src-supplier=RSComponents, ComponentLink2URL=https://datasheet.ciiva.com/11786/0900766b802d4699-11786267.pdf?src-supplier=RSComponents, ComponentLink3Description=https://datasheet.ciiva.com/2987/cy5v-2987766.pdf?src-supplier=Avnet, ComponentLink3URL=https://datasheet.ciiva.com/2987/cy5v-2987766.pdf?src-supplier=Avnet, ComponentLink4Description=https://datasheet.ciiva.com/11464/cy5v-11464567.pdf?src-supplier=Avnet, ComponentLink4URL=https://datasheet.ciiva.com/11464/cy5v-11464567.pdf?src-supplier=Avnet, ComponentLink5Description=https://datasheet.ciiva.com/16484/cy5v-16484423.pdf?src-supplier=Avnet+Asia, ComponentLink5URL=https://datasheet.ciiva.com/16484/cy5v-16484423.pdf?src-supplier=Avnet+Asia, ComponentLink6Description=https://datasheet.ciiva.com/14590/70001073-14590664.pdf?src-supplier=Allied+Electronics, ComponentLink6URL=https://datasheet.ciiva.com/14590/70001073-14590664.pdf?src-supplier=Allied+Electronics, ComponentLink7Description=https://datasheet.ciiva.com/203/cy5v-203689.pdf?src-supplier=Digi-Key, ComponentLink7URL=https://datasheet.ciiva.com/203/cy5v-203689.pdf?src-supplier=Digi-Key, ComponentLink8Description=https://datasheet.ciiva.com/203/cy5v-203690.pdf?src-supplier=Digi-Key, ComponentLink8URL=https://datasheet.ciiva.com/203/cy5v-203690.pdf?src-supplier=Digi-Key, ComponentLink9Description=https://datasheet.ciiva.com/203/cy5v-203691.pdf?src-supplier=Digi-Key, ComponentLink9URL=https://datasheet.ciiva.com/203/cy5v-203691.pdf?src-supplier=Digi-Key, ComponentLink10Description=https://datasheet.ciiva.com/28613/578190-28613276.pdf?src-supplier=Element14, ComponentLink10URL=https://datasheet.ciiva.com/28613/578190-28613276.pdf?src-supplier=Element14, ComponentLink11Description=https://datasheet.ciiva.com/1124/578190-1124654.pdf?src-supplier=Element14, ComponentLink11URL=https://datasheet.ciiva.com/1124/578190-1124654.pdf?src-supplier=Element14, ComponentLink12Description=https://datasheet.ciiva.com/1124/578190-1124655.pdf?src-supplier=Element14, ComponentLink12URL=https://datasheet.ciiva.com/1124/578190-1124655.pdf?src-supplier=Element14, Construction=Flat, Contact Plating=Tin,Matte, Depth=0.81mm, Dissipation Factor=7%, Height=0.9mm, Lead Free="Lead Free", Length=1.6mm, Manufacturer Part Number=06033G104ZAT2A, Mount="Surface Mount,PCB", Number of Pins=2, Packaging="Tape and Reel", Pricing 1="1=0.10000, 10=0.03000, 50=0.01660, 100=0.01350, 500=0.00966, 1000=0.00759 (USD)", Radiation Hardening=No, REACH SVHC="No SVHC", RoHS=Yes, RoHS Compliant=Yes, Series=-, Stock 1=1016354, Supplier 1=Digi-Key, Termination=SMD/SMT, Thickness=0.035inch, Voltage Rating=25V, Voltage Rating (DC)=25V, Width=0.032inch
C7: library part GRM0335C1H1R0BA01D, "0201 1 pF 50 V ±0.1 pF Tolerance C0G SMT Multilayer Ceramic Capacitor", Case Code (Imperial)=0201, Case Code (Metric)=0603, Dielectric=C0G, Manufacturer=Murata, Max Operating Temperature=125°C, Min Operating Temperature=-55°C, Package Quantity=15000, Voltage Rating=50V, Capacitance=1pF, Case/Package=0201, Category="Ceramic Capacitors", ComponentLink1Description=https://datasheet.ciiva.com/29538/partnumbering-e-01-29538566.pdf?src-supplier=Digi-Key, ComponentLink1URL=https://datasheet.ciiva.com/29538/partnumbering-e-01-29538566.pdf?src-supplier=Digi-Key, Depth=0.3mm, Lead Free="Lead Free", Length=0.024inch, Manufacturer Part Number=GRM0335C1H1R0BA01D, Mount="Surface Mount", Packaging="Tape and Reel", Pricing 1="1=0.10000, 10=0.02000, 50=0.01100, 100=0.00900, 500=0.00644, 1000=0.00506, 2500=0.00460, 5000=0.00423 (USD)", RoHS=Yes, RoHS Compliant=Yes, Series=GRM, Stock 1=1332849, Supplier 1=Digi-Key, Termination=SMD/SMT, Thickness=0.013inch, Voltage Rating (DC)=50V, Width=0.012inch
C8: library part GRM033R71E821KA01D, "0201 820 pF 25 V ±10% Tolerance X7R Multilayer Ceramic Capacitor", Case Code (Imperial)=0201, Case Code (Metric)=0603, Dielectric=X7R, Manufacturer=Murata, Max Operating Temperature=125°C, Min Operating Temperature=-55°C, Package Quantity=1, Tolerance=10%, Voltage=25V, Capacitance=820pF, Case/Package=0201, Category="Ceramic Capacitors", ComponentLink1Description=https://datasheet.ciiva.com/5414/product-5414169.pdf?src-supplier=Mouser, ComponentLink1URL=https://datasheet.ciiva.com/5414/product-5414169.pdf?src-supplier=Mouser, ComponentLink2Description=https://datasheet.ciiva.com/130/partnumbering-e-01-130155.pdf?src-supplier=Digi-Key, ComponentLink2URL=https://datasheet.ciiva.com/130/partnumbering-e-01-130155.pdf?src-supplier=Digi-Key, ComponentLink3Description=https://datasheet.ciiva.com/11602/product-11602283.pdf?src-supplier=Avnet, ComponentLink3URL=https://datasheet.ciiva.com/11602/product-11602283.pdf?src-supplier=Avnet, ComponentLink4Description=https://datasheet.ciiva.com/130/partnumbering-e-01-130156.pdf?src-supplier=Digi-Key, ComponentLink4URL=https://datasheet.ciiva.com/130/partnumbering-e-01-130156.pdf?src-supplier=Digi-Key, ComponentLink5Description=https://datasheet.ciiva.com/130/partnumbering-e-01-130157.pdf?src-supplier=Digi-Key, ComponentLink5URL=https://datasheet.ciiva.com/130/partnumbering-e-01-130157.pdf?src-supplier=Digi-Key, ComponentLink6Description=https://datasheet.ciiva.com/17453/product-17453309.pdf?src-supplier=Avnet+Europe, ComponentLink6URL=https://datasheet.ciiva.com/17453/product-17453309.pdf?src-supplier=Avnet+Europe, Construction=Flat, Depth=0.3mm, Height=0.3mm, Lead Free="Lead Free", Length=0.6mm, Manufacturer Part Number=GRM033R71E821KA01D, Mount="Surface Mount", Packaging="Tape and Reel", Pricing 1="1=0.10000, 10=0.02700, 50=0.01440, 100=0.01180, 500=0.00846, 1000=0.00664, 2500=0.00604, 5000=0.00555 (USD)", Radiation Hardening=No, RoHS=Yes, RoHS Compliant=Yes, Series=GRM, Stock 1=127531, Supplier 1=Digi-Key, Termination=SMD/SMT, Thickness=0.013inch, Voltage Rating=25V, Voltage Rating (DC)=25V, Width=0.3mm
C9 C10 C11: library part GRM188C71A475KE11D, "0603 4.7 uF 10 V ±10% Tolerance X7S Multilayer Ceramic Capacitor", Case Code (Imperial)=0603, Case Code (Metric)=1608, Dielectric=X7S, Manufacturer=Murata, Max Operating Temperature=125°C, Min Operating Temperature=-55°C, Package Quantity=4000, Resistor Type=Ceramic, Tolerance=10%, Voltage Rating=10V, Capacitance=4.7uF, Case/Package=0603, Category="Ceramic Capacitors", ComponentLink1Description=http://www.mouser.com/ds/2/281/c02e-2905.pdf?src-supplier=Mouser, ComponentLink1URL=http://www.mouser.com/ds/2/281/c02e-2905.pdf?src-supplier=Mouser, ComponentLink2Description=http://search.murata.co.jp/Ceramy/image/img/A01X/G101/ENG/GRM188C71A475KE11-01.pdf?src-supplier=Digi-Key, ComponentLink2URL=http://search.murata.co.jp/Ceramy/image/img/A01X/G101/ENG/GRM188C71A475KE11-01.pdf?src-supplier=Digi-Key, Height=0.8mm, Length=1.6mm, Manufacturer Part Number=GRM188C71A475KE11D, Material=Ceramic, Mount="Surface Mount", Packaging="Tape and Reel", Pricing 1="50=0.27400 (USD)", RoHS=Yes, RoHS Compliant=Yes, Stock 1=1, Supplier 1=RSComponents, Termination=SMD/SMT, Thickness=0.037inch, Voltage Rating (DC)=10V, Weight=0.000222oz, Width=0.8mm
C12 C25 C26: library part CL05A104KA5NNNC, "Cap Ceramic 0.1uF 25V X5R 10% Pad SMD 0402 85¡ãC T/R / Multi Layer Ceramic Capacitor (MLCC)", Case Code (Imperial)=0402, Case Code (Metric)=1005, Dielectric=X5R, Manufacturer=Samsung, Max Operating Temperature=85°C, Min Operating Temperature=-55°C, Package Quantity=1, Tolerance=10%, Voltage=25V, Capacitance=100nF, Case/Package=0402, Category="Ceramic Capacitors", ComponentLink1Description=https://datasheet.ciiva.com/25802/cl05a104ka5nnnc-25802704.pdf?src-supplier=Digi-Key, ComponentLink1URL=https://datasheet.ciiva.com/25802/cl05a104ka5nnnc-25802704.pdf?src-supplier=Digi-Key, ComponentLink2Description=https://datasheet.ciiva.com/16437/cl05a104ka5nnnc-16437369.pdf?src-supplier=Future+Electronics, ComponentLink2URL=https://datasheet.ciiva.com/16437/cl05a104ka5nnnc-16437369.pdf?src-supplier=Future+Electronics, ComponentLink3Description=https://datasheet.ciiva.com/26838/getdatasheetpartid-357412-26838142.pdf?src-supplier=Verical, ComponentLink3URL=https://datasheet.ciiva.com/26838/getdatasheetpartid-357412-26838142.pdf?src-supplier=Verical, ComponentLink4Description=https://datasheet.ciiva.com/26309/mlcc-catalogdownload2013-eng-26309014.pdf?src-supplier=Distrelec, ComponentLink4URL=https://datasheet.ciiva.com/26309/mlcc-catalogdownload2013-eng-26309014.pdf?src-supplier=Distrelec, Depth=0.5mm, Height=0.5mm, Lead Free="Lead Free", Length=1mm, Manufacturer Part Number=CL05A104KA5NNNC, Mount="Surface Mount", Packaging="Tape and Reel", Pricing 1="1=0.10000, 10=0.01100, 50=0.00620, 100=0.00510, 500=0.00362, 1000=0.00285, 2500=0.00259, 5000=0.00238 (USD)", Radiation Hardening=No, RoHS=Yes, Stock 1=6603507, Supplier 1=Digi-Key, Thickness=0.022inch, Voltage Rating=25V, Voltage Rating (DC)=25V, Width=0.02inch
C14 C15: library part 06035C103JAZ2A, "0603 10 nF 50V ±5 % Tolerance X7R Surface Mount Multilayer Ceramic Capacitor", Case Code (Imperial)=0603, Case Code (Metric)=1608, Dielectric=X7R, Manufacturer="Kyocera AVX", Max Operating Temperature=125°C, Min Operating Temperature=-55°C, Package Quantity=1, Tolerance=5%, Voltage Rating=50V, Capacitance=10nF, Case/Package=0603, Category="Ceramic Capacitors", ComponentLink1Description=https://datasheet.ciiva.com/17488/flexiterm-17488982.pdf?src-supplier=Avnet+Europe, ComponentLink1URL=https://datasheet.ciiva.com/17488/flexiterm-17488982.pdf?src-supplier=Avnet+Europe, ComponentLink2Description=https://datasheet.ciiva.com/162/flexiterm-162263.pdf?src-supplier=Digi-Key, ComponentLink2URL=https://datasheet.ciiva.com/162/flexiterm-162263.pdf?src-supplier=Digi-Key, ComponentLink3Description=https://datasheet.ciiva.com/162/flexiterm-162264.pdf?src-supplier=Digi-Key, ComponentLink3URL=https://datasheet.ciiva.com/162/flexiterm-162264.pdf?src-supplier=Digi-Key, ComponentLink4Description=https://datasheet.ciiva.com/162/flexiterm-162265.pdf?src-supplier=Digi-Key, ComponentLink4URL=https://datasheet.ciiva.com/162/flexiterm-162265.pdf?src-supplier=Digi-Key, ComponentLink5Description=https://datasheet.ciiva.com/1124/1679506-1124844.pdf?src-supplier=Element14, ComponentLink5URL=https://datasheet.ciiva.com/1124/1679506-1124844.pdf?src-supplier=Element14, ComponentLink6Description=https://datasheet.ciiva.com/1124/1679506-1124845.pdf?src-supplier=Element14, ComponentLink6URL=https://datasheet.ciiva.com/1124/1679506-1124845.pdf?src-supplier=Element14, ComponentLink7Description=https://datasheet.ciiva.com/11561/flexiterm-11561503.pdf?src-supplier=Avnet, ComponentLink7URL=https://datasheet.ciiva.com/11561/flexiterm-11561503.pdf?src-supplier=Avnet, ComponentLink8Description=https://datasheet.ciiva.com/16327/cx7r-16327071.pdf?src-supplier=Future+Electronics, ComponentLink8URL=https://datasheet.ciiva.com/16327/cx7r-16327071.pdf?src-supplier=Future+Electronics, Construction=Flat, Depth=0.81mm, Dissipation Factor=2.5%, Features="Soft Termination", Height=0.035mm, Lead Free="Lead Free", Length=1.6mm, Manufacturer Part Number=06035C103JAZ2A, Mount="Surface Mount", Number of Pins=2, Packaging="Tape and Reel", Pricing 1="1=0.14000, 10=0.10200, 50=0.05820, 100=0.04820, 500=0.03378, 1000=0.02797 (USD)", Radiation Hardening=No, REACH SVHC="No SVHC", RoHS=Yes, RoHS Compliant=Yes, Series=FLEXITERM®, Stock 1=97, Supplier 1=Digi-Key, Termination=SMD/SMT, Thickness=0.035inch, Voltage Rating (DC)=50V, Width=0.81mm
C18: library part 06035C222KAT2A, "0603 2.2 nF 50V ±10 % Tolerance X7R Surface Mount Multilayer Ceramic Capacitor", Case Code (Imperial)=0603, Case Code (Metric)=1608, Dielectric=X7R, Dielectric Material=Ceramic, Manufacturer="Kyocera AVX", Max Operating Temperature=125°C, Min Operating Temperature=-55°C, Package Quantity=1, Tolerance=10%, Voltage=25V, Voltage Rating=50V, Capacitance=2.2nF, Case/Package=0603, Category="Ceramic Capacitors", ComponentLink1Description=https://datasheet.ciiva.com/11788/0900766b802d4698-11788065.pdf?src-supplier=RSComponents, ComponentLink1URL=https://datasheet.ciiva.com/11788/0900766b802d4698-11788065.pdf?src-supplier=RSComponents, ComponentLink2Description=https://datasheet.ciiva.com/2987/cx7r-2987841.pdf?src-supplier=Avnet, ComponentLink2URL=https://datasheet.ciiva.com/2987/cx7r-2987841.pdf?src-supplier=Avnet, ComponentLink3Description=https://datasheet.ciiva.com/28546/cx7r-28546597.pdf?src-supplier=Element14, ComponentLink3URL=https://datasheet.ciiva.com/28546/cx7r-28546597.pdf?src-supplier=Element14, ComponentLink4Description=https://datasheet.ciiva.com/160/cx7r-160968.pdf?src-supplier=Digi-Key, ComponentLink4URL=https://datasheet.ciiva.com/160/cx7r-160968.pdf?src-supplier=Digi-Key, ComponentLink5Description=https://datasheet.ciiva.com/160/cx7r-160969.pdf?src-supplier=Digi-Key, ComponentLink5URL=https://datasheet.ciiva.com/160/cx7r-160969.pdf?src-supplier=Digi-Key, ComponentLink6Description=https://datasheet.ciiva.com/160/cx7r-160970.pdf?src-supplier=Digi-Key, ComponentLink6URL=https://datasheet.ciiva.com/160/cx7r-160970.pdf?src-supplier=Digi-Key, ComponentLink7Description=https://datasheet.ciiva.com/1457/1679506-1457930.pdf?src-supplier=Element14, ComponentLink7URL=https://datasheet.ciiva.com/1457/1679506-1457930.pdf?src-supplier=Element14, ComponentLink8Description=https://datasheet.ciiva.com/1457/1679506-1457931.pdf?src-supplier=Element14, ComponentLink8URL=https://datasheet.ciiva.com/1457/1679506-1457931.pdf?src-supplier=Element14, ComponentLink9Description=https://datasheet.ciiva.com/5415/cx7r-218113-5415163.pdf?src-supplier=Mouser, ComponentLink9URL=https://datasheet.ciiva.com/5415/cx7r-218113-5415163.pdf?src-supplier=Mouser, Construction=Flat, Contact Plating=Tin,Matte, Depth=0.81mm, Dissipation Factor=2.5%, Height=0.9mm, Lead Free="Lead Free", Length=1.6mm, Manufacturer Part Number=06035C222KAT2A, Mount="Surface Mount", Number of Pins=2, Packaging="Tape and Reel", Pricing 1="1=0.10000, 10=0.06400, 50=0.03500, 100=0.02850, 500=0.02036, 1000=0.01600 (USD)", Radiation Hardening=No, REACH SVHC="No SVHC", RoHS=Yes, RoHS Compliant=Yes, Series=-, Stock 1=363118, Supplier 1=Digi-Key, Termination=SMD/SMT, Thickness=0.035inch, Voltage Rating (DC)=50V, Width=0.032inch
C19: library part C1005X5R1C225M050BC, "Cap Ceramic 2.2uF 16V X5R 20% SMD 0402 85C Paper T/R", Case Code (Imperial)=0402, Case Code (Metric)=1005, Dielectric=X5R, Dielectric Material=Ceramic, Manufacturer=TDK, Max Operating Temperature=85°C, Min Operating Temperature=-55°C, Package Quantity=1, Tolerance=20%, Voltage Rating=16V, Capacitance=2.2uF, Case/Package=0402, Category="Ceramic Capacitors", ComponentLink1Description=https://datasheet.ciiva.com/24217/c1005x5r1c225m050bc-264319-24217866.pdf?src-supplier=Mouser, ComponentLink1URL=https://datasheet.ciiva.com/24217/c1005x5r1c225m050bc-264319-24217866.pdf?src-supplier=Mouser, ComponentLink2Description=https://datasheet.ciiva.com/6290/tdkmlcccaprange-6290133.pdf?src-supplier=Digi-Key, ComponentLink2URL=https://datasheet.ciiva.com/6290/tdkmlcccaprange-6290133.pdf?src-supplier=Digi-Key, ComponentLink3Description=https://datasheet.ciiva.com/6290/tdkmlcccaprange-6290135.pdf?src-supplier=Digi-Key, ComponentLink3URL=https://datasheet.ciiva.com/6290/tdkmlcccaprange-6290135.pdf?src-supplier=Digi-Key, Depth=0.5mm, Height=0.5mm, Lead Free="Lead Free", Length=1mm, Manufacturer Part Number=C1005X5R1C225M050BC, Mount="Surface Mount", Packaging="Tape and Reel", Pricing 1="1=0.35000, 10=0.24200, 50=0.16100, 100=0.13680, 500=0.09660, 1000=0.08452, 2500=0.08050, 5000=0.07446 (USD)", REACH SVHC="No SVHC", Resistor Type=Ceramic, RoHS=Yes, RoHS Compliant=Yes, Series=C, Stock 1=5540, Supplier 1=Digi-Key, Termination=SMD/SMT, Thickness=0.022inch, Voltage Rating (DC)=16V, Weight=2.3E-05oz, Width=0.02inch
C20: library part 0402YD105KAT2A, "0402 1 uF 16 V ±10 % Tolerance X5R Surface Mount Multilayer Ceramic Capacitor", Case Code (Imperial)=0402, Case Code (Metric)=1005, Dielectric=X5R, Manufacturer="Kyocera AVX", Max Operating Temperature=85°C, Min Operating Temperature=-55°C, Package Quantity=10000, Tolerance=10%, Voltage Rating=16V, Capacitance=1uF, Case/Package=0402, Category="Ceramic Capacitors", ComponentLink1Description=https://datasheet.ciiva.com/1126/1598274-1126025.pdf?src-supplier=Farnell, ComponentLink1URL=https://datasheet.ciiva.com/1126/1598274-1126025.pdf?src-supplier=Farnell, ComponentLink2Description=https://datasheet.ciiva.com/1124/1598274-1124011.pdf?src-supplier=Element14, ComponentLink2URL=https://datasheet.ciiva.com/1124/1598274-1124011.pdf?src-supplier=Element14, ComponentLink3Description=https://datasheet.ciiva.com/6269/cx5r-6269291.pdf?src-supplier=Digi-Key, ComponentLink3URL=https://datasheet.ciiva.com/6269/cx5r-6269291.pdf?src-supplier=Digi-Key, Construction=Flat, Contact Plating=Tin, Depth=0.5mm, Lead Free="Lead Free", Length=0.039inch, Manufacturer Part Number=0402YD105KAT2A, Mount="Surface Mount", Number of Pins=2, Packaging="Tape and Reel", Pricing 1="1=0.39000, 10=0.26500, 50=0.17660, 100=0.15010, 500=0.10598, 1000=0.09274, 2500=0.08832, 5000=0.08170 (USD)", REACH SVHC="No SVHC", RoHS=Yes, RoHS Compliant=Yes, Stock 1=27570, Supplier 1=Digi-Key, Termination=SMD/SMT, Thickness=0.022inch, Voltage Rating (DC)=16V, Weight=2.3E-05oz, Width=0.02inch
C21: library part 0603YC683JAT2A, "0603 68 nF 16 V ±5 % Tolerance X7R Surface Mount Multilayer Ceramic Capacitor", Case Code (Imperial)=0603, Case Code (Metric)=1608, Dielectric=X7R, Manufacturer="Kyocera AVX", Max Operating Temperature=125°C, Min Operating Temperature=-55°C, Package Quantity=1, Tolerance=5%, Voltage Rating=16V, Capacitance=68nF, Case/Package=0603, Category="Ceramic Capacitors", ComponentLink1Description=https://datasheet.ciiva.com/11577/cx7r-11577158.pdf?src-supplier=Avnet, ComponentLink1URL=https://datasheet.ciiva.com/11577/cx7r-11577158.pdf?src-supplier=Avnet, ComponentLink2Description=https://datasheet.ciiva.com/16507/cx7r-16507206.pdf?src-supplier=Future+Electronics, ComponentLink2URL=https://datasheet.ciiva.com/16507/cx7r-16507206.pdf?src-supplier=Future+Electronics, ComponentLink3Description=https://datasheet.ciiva.com/152/cx7r-152731.pdf?src-supplier=Digi-Key, ComponentLink3URL=https://datasheet.ciiva.com/152/cx7r-152731.pdf?src-supplier=Digi-Key, ComponentLink4Description=https://datasheet.ciiva.com/14912/cx7r-14912559.pdf?src-supplier=Digi-Key, ComponentLink4URL=https://datasheet.ciiva.com/14912/cx7r-14912559.pdf?src-supplier=Digi-Key, Construction=Flat, Contact Plating=Tin,Matte, Depth=0.81mm, Lead Free="Lead Free", Length=1.6mm, Manufacturer Part Number=0603YC683JAT2A, Mount="Surface Mount", Number of Pins=2, Packaging="Tape and Reel", Radiation Hardening=No, REACH SVHC=Unknown, RoHS=Yes, RoHS Compliant=Yes, Series=-, Supplier 1=Newark, Termination=SMD/SMT, Thickness=0.035inch, Voltage Rating (DC)=16V, Width=0.032inch
C22: library part CL05B104KP5NNNC, "Cap Ceramic 0.1uF 10V X7R 10% Pad SMD 0402 125C T/R", Case Code (Imperial)=0402, Case Code (Metric)=1005, Dielectric=X7R, Manufacturer=Samsung, Max Operating Temperature=125°C, Min Operating Temperature=-55°C, Package Quantity=1, Tolerance=10%, Voltage Rating=10V, Capacitance=100nF, Case/Package=0402, Category="Ceramic Capacitors", ComponentLink1Description=https://datasheet.ciiva.com/15165/getdatasheetpartid-37100-15165107.pdf?src-supplier=Verical, ComponentLink1URL=https://datasheet.ciiva.com/15165/getdatasheetpartid-37100-15165107.pdf?src-supplier=Verical, ComponentLink2Description=https://datasheet.ciiva.com/26787/cl05b104kp5nnnc-26787004.pdf?src-supplier=IIIC, ComponentLink2URL=https://datasheet.ciiva.com/26787/cl05b104kp5nnnc-26787004.pdf?src-supplier=IIIC, ComponentLink3Description=https://datasheet.ciiva.com/16498/cl05b104kq5nnnc-16498491.pdf?src-supplier=Future+Electronics, ComponentLink3URL=https://datasheet.ciiva.com/16498/cl05b104kq5nnnc-16498491.pdf?src-supplier=Future+Electronics, Construction=Flat, Contact Plating=Tin, Depth=0.5mm, Height=0.5mm, Length=1mm, Manufacturer Part Number=CL05B104KP5NNNC, Mount="Surface Mount", Packaging="Tape and Reel", Pricing 1="1=0.10000, 10=0.02700, 50=0.01460, 100=0.01200, 500=0.00858, 1000=0.00674, 2500=0.00612, 5000=0.00563 (USD)", Radiation Hardening=No, RoHS=Yes, RoHS Compliant=Yes, Series=CL, Stock 1=6904136, Supplier 1=Digi-Key, Thickness=0.022inch, Width=0.02inch
C23 C24: library part 02016D474KAT2A, "Cap Ceramic 0.47uF 6.3V X5R 10% SMD 0201 85C Paper T/R", Case/Package=0201, Dielectric=X5R, Manufacturer="Kyocera AVX", Max Operating Temperature=85°C, Min Operating Temperature=-55°C, Package Quantity=15000, Tolerance=10%, Voltage Rating (DC)=6.3V, Capacitance=470nF, Category="Ceramic Capacitors", ComponentLink1Description=https://datasheet.ciiva.com/13272/cx5r-33896-13272439.pdf?src-supplier=Mouser, ComponentLink1URL=https://datasheet.ciiva.com/13272/cx5r-33896-13272439.pdf?src-supplier=Mouser, Depth=0.3mm, Length=0.6mm, Manufacturer Part Number=02016D474KAT2A, Packaging="Tape and Reel", Pricing 1="1=0.10000, 10=0.05900, 50=0.03240, 100=0.02650, 500=0.01892, 1000=0.01486, 2500=0.01351, 5000=0.01243 (USD)", RoHS=Yes, RoHS Compliant=Yes, Stock 1=336619, Supplier 1=Digi-Key
IC1: "Linear Battery Charger Li-Ion 7.5mA 4.2V/4.35V 12-Pin LQFN EP T/R", Manufacturer="Analog Devices / Linear Technology", Manufacturer Part Number=LTC4126EV#TRPBF, Category="Battery Management", Pricing 1="1=6.48000, 10=5.85700, 25=5.58480, 100=4.84910, 250=4.63112, 500=4.24050 (USD)", RoHS=Yes, RoHS Compliant=No, Supplier 1=Digi-Key
IC2: "Low power (5 Hz, <1µA), low voltage (up to 5.5V) switch 4-X2SON -40 to 85", Manufacturer="Texas Instruments", Max Operating Temperature=85°C, Max Output Current=5mA, Max Supply Current=2.7mA, Min Operating Temperature=-40°C, Supplier Part Number 1=296-47767-1-ND, Category="Integrated Circuits (ICs)", ComponentLink1Description=http://www.ti.com/lit/ds/symlink/drv5032.pdf?src-supplier=Digi-Key, ComponentLink1URL=http://www.ti.com/lit/ds/symlink/drv5032.pdf?src-supplier=Digi-Key, ComponentLink2Description=http://www.ti.com/general/docs/suppproductinfo.tsp?distId=10&amp;gotoUrl=http%3A%2F%2Fwww.ti.com%2Flit%2Fgpn%2Fdrv5032&src-supplier=Digi-Key, ComponentLink2URL=http://www.ti.com/general/docs/suppproductinfo.tsp?distId=10&amp;gotoUrl=http%3A%2F%2Fwww.ti.com%2Flit%2Fgpn%2Fdrv5032&src-supplier=Digi-Key, Manufacturer Part Number=DRV5032FDDMRR, Packaging="Cut Tape", Pricing 1="1=0.89000, 10=0.78000, 25=0.73280, 100=0.59800, 250=0.55548, 500=0.47276, 1000=0.39025 (USD)", RoHS=Yes, RoHS Compliant=Yes, Sensing Method="Hall Effect", Supplier 1=Digi-Key
J1: "Connector", Manufacturer_Name="Tag Connect", Height=18.669mm, Manufacturer_Part_Number=TC2030-IDC-NL